# EAGLE board Battery_Block-Panel-v10 (EAGLE 6.6.0), part 1 of 3
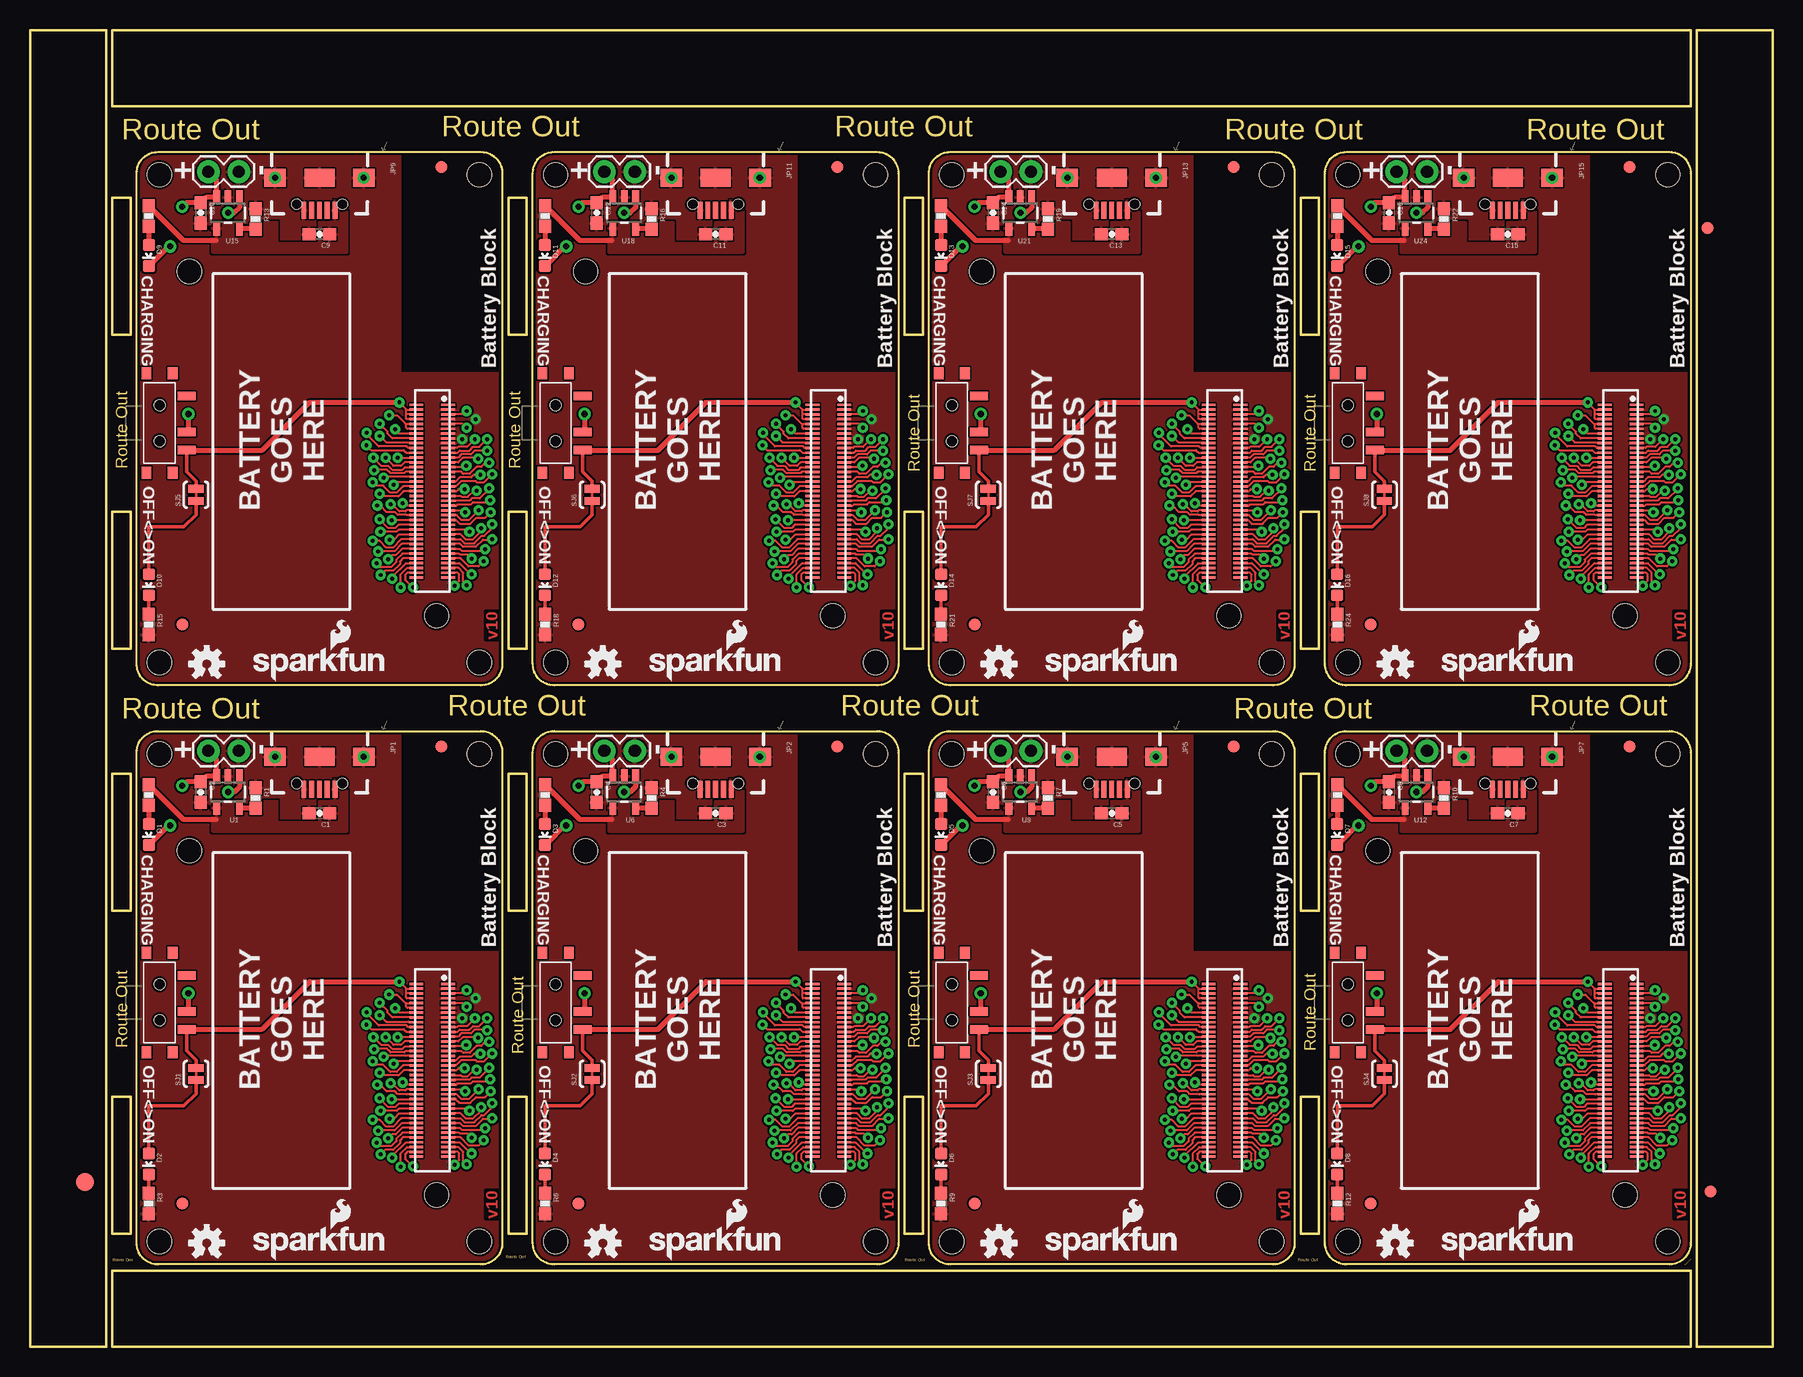
[diagram p0: board, top side]
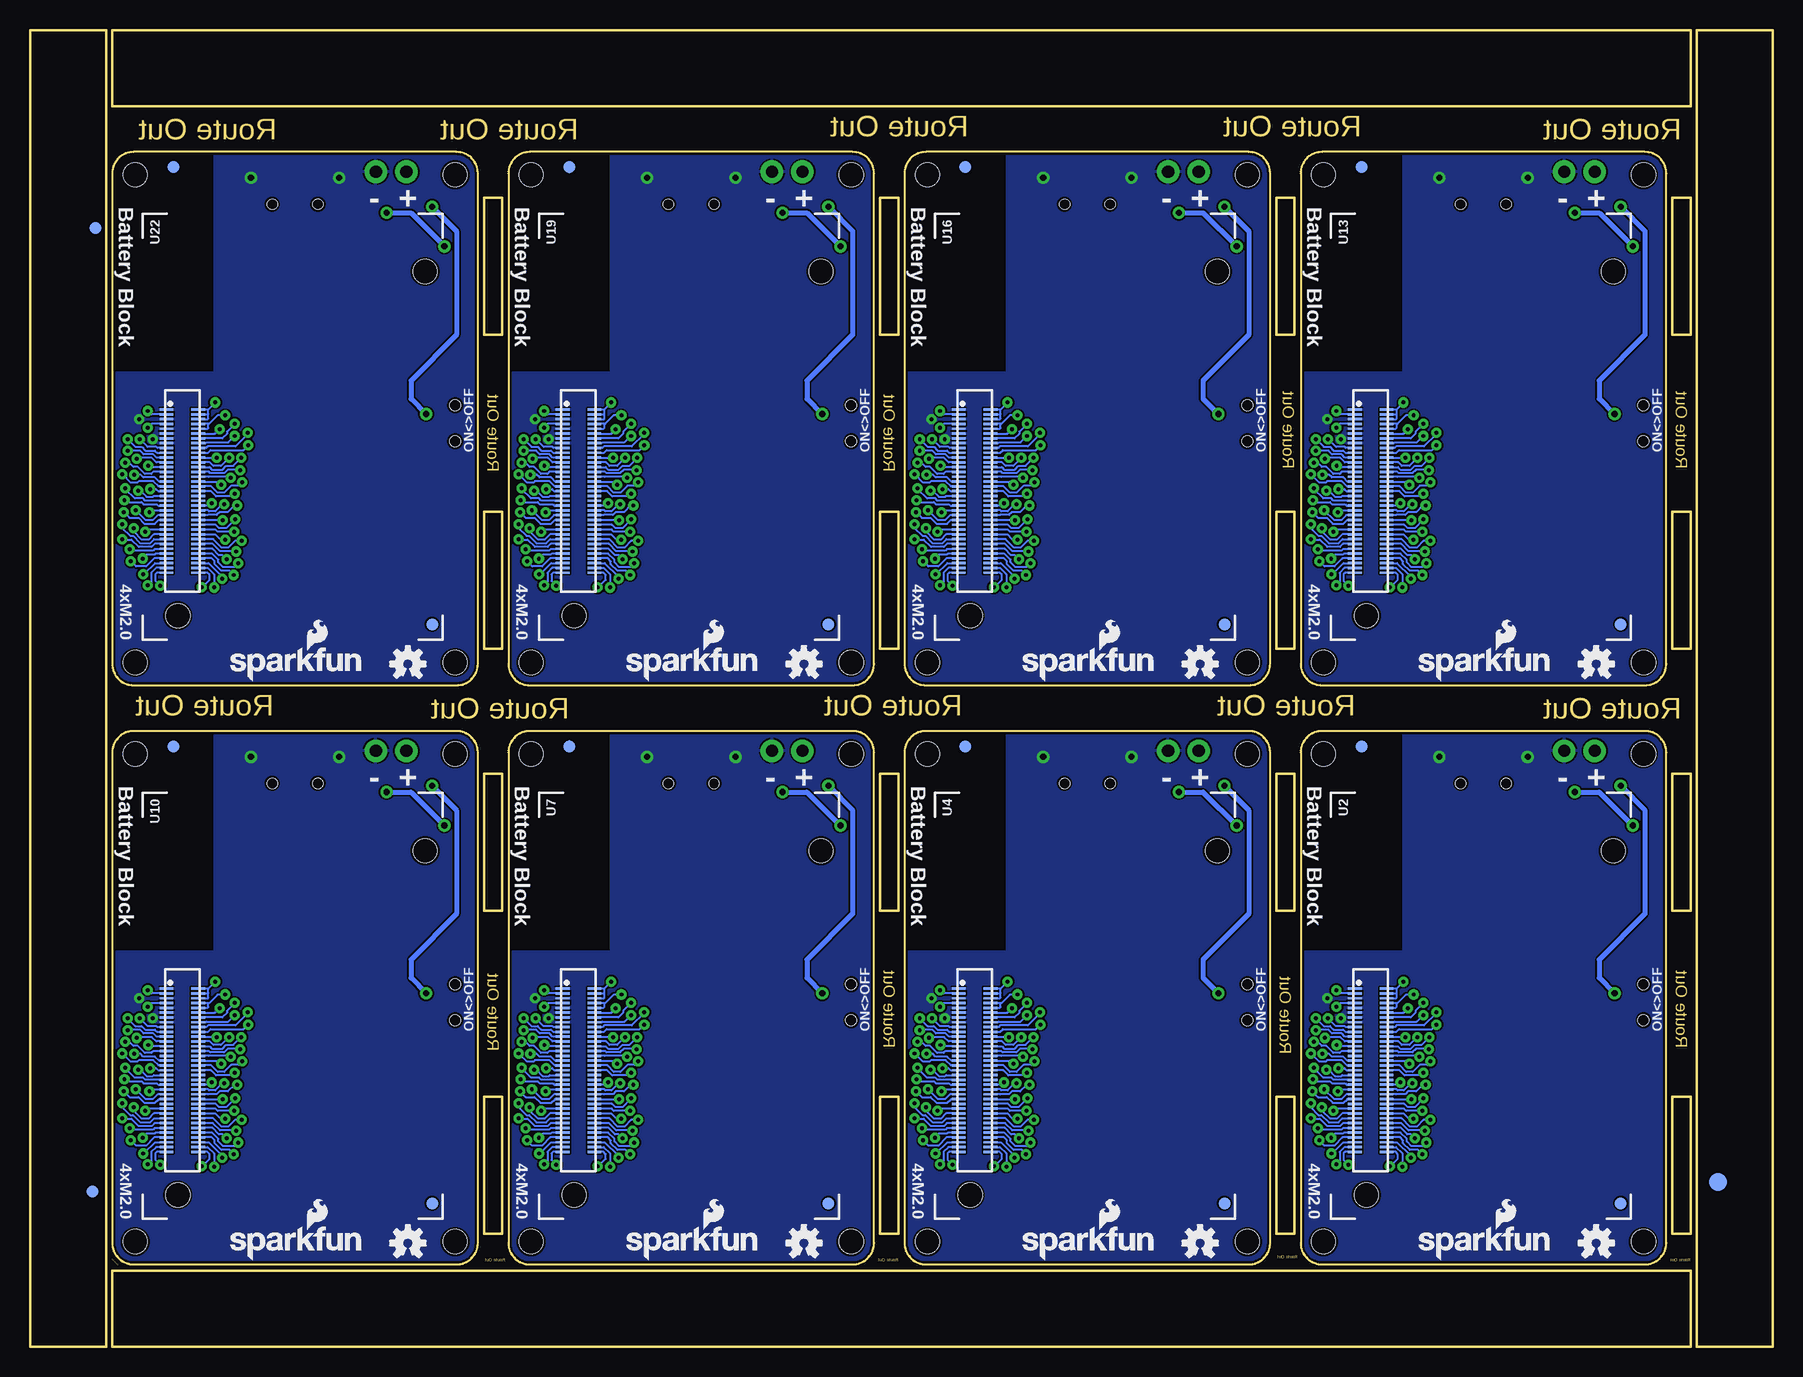
[diagram p1: board, bottom side, seen from below]

Size 145.29 x 109.73 mm. Coordinates in mm from the lower left corner, seen from the top.
Outline: 6.35,79.25 6.35,0 0,0 0,29.72
Outline: 0,27.18 0,109.73 6.35,109.73 6.35,76.71
Outline: 39.37,49.53 39.37,8.64 arc-90 37.59,6.86 10.67,6.86 arc-90 8.89,8.64 8.89,49.53 arc-90 10.67,51.31 37.59,51.31 arc-90 39.37,49.53
Outline: 72.39,49.53 72.39,8.64 arc-90 70.61,6.86 43.69,6.86 arc-90 41.91,8.64 41.91,49.53 arc-90 43.69,51.31 70.61,51.31 arc-90 72.39,49.53
Outline: 105.41,49.53 105.41,8.64 arc-90 103.63,6.86 76.71,6.86 arc-90 74.93,8.64 74.93,49.53 arc-90 76.71,51.31 103.63,51.31 arc-90 105.41,49.53
Outline: 138.43,49.53 138.43,8.64 arc-90 136.65,6.86 109.73,6.86 arc-90 107.95,8.64 107.95,49.53 arc-90 109.73,51.31 136.65,51.31 arc-90 138.43,49.53
Outline: 39.37,97.79 39.37,56.9 arc-90 37.59,55.12 10.67,55.12 arc-90 8.89,56.9 8.89,97.79 arc-90 10.67,99.57 37.59,99.57 arc-90 39.37,97.79
Outline: 72.39,97.79 72.39,56.9 arc-90 70.61,55.12 43.69,55.12 arc-90 41.91,56.9 41.91,97.79 arc-90 43.69,99.57 70.61,99.57 arc-90 72.39,97.79
Outline: 105.41,97.79 105.41,56.9 arc-90 103.63,55.12 76.71,55.12 arc-90 74.93,56.9 74.93,97.79 arc-90 76.71,99.57 103.63,99.57 arc-90 105.41,97.79
Outline: 138.43,97.79 138.43,56.9 arc-90 136.65,55.12 109.73,55.12 arc-90 107.95,56.9 107.95,97.79 arc-90 109.73,99.57 136.65,99.57 arc-90 138.43,97.79
Outline: 6.86,0 138.43,0 138.43,6.35 6.86,6.35 6.86,0
Outline: 145.29,0 145.29,109.73 138.94,109.73 138.94,0 145.29,0
Outline: 138.43,109.73 6.86,109.73 6.86,103.38 138.43,103.38 138.43,109.73
Outline: 8.38,9.4 8.38,20.83 6.86,20.83 6.86,9.4 8.38,9.4
Outline: 41.4,9.4 41.4,20.83 39.88,20.83 39.88,9.4 41.4,9.4
Outline: 74.42,9.4 74.42,20.83 72.9,20.83 72.9,9.4 74.42,9.4
Outline: 107.44,9.4 107.44,20.83 105.92,20.83 105.92,9.4 107.44,9.4
Outline: 105.92,47.75 105.92,36.32 107.44,36.32 107.44,47.75 105.92,47.75
Outline: 72.9,47.75 72.9,36.32 74.42,36.32 74.42,47.75 72.9,47.75
Outline: 39.88,47.75 39.88,36.32 41.4,36.32 41.4,47.75 39.88,47.75
Outline: 6.86,47.75 6.86,36.32 8.38,36.32 8.38,47.75 6.86,47.75
Outline: 8.38,58.17 8.38,69.6 6.86,69.6 6.86,58.17 8.38,58.17
Outline: 41.4,58.17 41.4,69.6 39.88,69.6 39.88,58.17 41.4,58.17
Outline: 74.42,58.17 74.42,69.6 72.9,69.6 72.9,58.17 74.42,58.17
Outline: 107.44,58.17 107.44,69.6 105.92,69.6 105.92,58.17 107.44,58.17
Outline: 105.92,95.76 105.92,84.33 107.44,84.33 107.44,95.76 105.92,95.76
Outline: 72.9,95.76 72.9,84.33 74.42,84.33 74.42,95.76 72.9,95.76
Outline: 39.88,95.76 39.88,84.33 41.4,84.33 41.4,95.76 39.88,95.76
Outline: 6.86,95.76 6.86,84.33 8.38,84.33 8.38,95.76 6.86,95.76
Copper layers (1*16): Top 0.035mm / dielectric 1.5mm / Bottom 0.035mm
Design rules "SparkFun-2-layer *": minimum track width 6mil, minimum drill 13mil, track to track 6mil, track to pad 6mil, pad to pad 6mil, via to via 6mil, smd to smd 6mil, copper to edge 8mil, drill to drill 8mil, minimum pad ring 12mil, minimum via ring 10mil, stop-mask expansion 4mil, vias tented up to drill 20mil, thermal gap 6mil
Holes 2 mm at 37.47,8.76 10.79,8.76 10.79,49.4 37.47,49.4 70.48,8.76 43.81,8.76 43.81,49.4 70.48,49.4 103.5,8.76 76.83,8.76 76.83,49.4 103.5,49.4 136.53,8.76 109.86,8.76 109.86,49.4 136.53,49.4 37.47,57.02 10.79,57.02 10.79,97.66 37.47,97.66 70.48,57.02 43.81,57.02 43.81,97.66 70.48,97.66 103.5,57.02 76.83,57.02 76.83,97.66 103.5,97.66 136.53,57.02 109.86,57.02 109.86,97.66 136.53,97.66
tRestrict: area 31,33 to 39.4,51.3; area 64,33 to 72.4,51.3; area 97,33 to 105.4,51.3; area 130,33 to 138.4,51.3; area 31,81.3 to 39.4,99.6; area 64,81.3 to 72.4,99.6; area 97,81.3 to 105.4,99.6; area 130,81.3 to 138.4,99.6
bRestrict: area 31,33 to 39.4,51.3; area 64,33 to 72.4,51.3; area 97,33 to 105.4,51.3; area 130,33 to 138.4,51.3; area 31,81.3 to 39.4,99.6; area 64,81.3 to 72.4,99.6; area 97,81.3 to 105.4,99.6; area 130,81.3 to 138.4,99.6

## Footprints (pad centres in the part's own frame; a part is rotated, then mirrored left to right if it is on the bottom)
0603-CAP = smd 1.1 x 1: 1 -0.85,0; 2 0.85,0
LED-0603 = smd 1 x 1: A 0,-0.877; C 0,0.877
FIDUCIAL-1.5X3 = smd 1.5 x 1.5: 1 0,0
FIDUCIAL-1X2 = smd 1 x 1: 1 0,0
USB-B-MICRO-SMD_V03 = smd 1.4 x 0.4: D+1 2.7,0; D-1 2.7,0.65; GND1 2.7,-1.3; ID1 2.7,-0.65; VBUS1 2.7,1.3 | smd 1.5 x 1.8: SHIELD1 0,3.7; SHIELD2 0,-3.7 | smd 1.5 x 2.5: SHIELD3 0,0 | hole 0.85: 2.2,1.9; 2.2,-1.9
1X02 = drill 1.016 pad 1.88: 1 0,0; 2 2.54,0
0603-RES = smd 1.1 x 1: 1 -0.85,0; 2 0.85,0
PAD-JUMPER-2-NC_BY_TRACE_YES_SILK = smd 0.635 x 1.27: 1 -0.508,0; 2 0.508,0
KPS-1290 = smd 0.7 x 1.5: O -2.25,2.25; P 0.75,2.25; S 2.25,2.25 | smd 1 x 0.8: P$1 -4.15,1.1; P$2 -4.15,-1.1; P$3 4.15,-1.1; P$4 4.15,1.1 | hole 0.9: -1.5,0; 1.5,0
SOT23-5 = smd 0.55 x 1.2: 1 -0.95,-1.3; 2 0,-1.3; 3 0.95,-1.3; 4 0.95,1.3; 5 -0.95,1.3
EDISON_DAUGHTER = smd 1.14 x 0.2: 1 1.98,19.17; 2 4.62,19.17; 3 1.98,18.77; 4 4.62,18.77; 5 1.98,18.37; 6 4.62,18.37; 7 1.98,17.97; 8 4.62,17.97; 9 1.98,17.57; 10 4.62,17.57; 11 1.98,17.17; 12 4.62,17.17; 13 1.98,16.77; 14 4.62,16.77; 15 1.98,16.37; 16 4.62,16.37; 17 1.98,15.97; 18 4.62,15.97; 19 1.98,15.57; 20 4.62,15.57; 21 1.98,15.17; 22 4.62,15.17; 23 1.98,14.77; 24 4.62,14.77; 25 1.98,14.37; 26 4.62,14.37; 27 1.98,13.97; 28 4.62,13.97; 29 1.98,13.57; 30 4.62,13.57; 31 1.98,13.17; 32 4.62,13.17; 33 1.98,12.77; 34 4.62,12.77; 35 1.98,12.37; 36 4.62,12.37; 37 1.98,11.97; 38 4.62,11.97; 39 1.98,11.57; 40 4.62,11.57; 41 1.98,11.17; 42 4.62,11.17; 43 1.98,10.77; 44 4.62,10.77; 45 1.98,10.37; 46 4.62,10.37; 47 1.98,9.97; 48 4.62,9.97; 49 1.98,9.57; 50 4.62,9.57; 51 1.98,9.17; 52 4.62,9.17; 53 1.98,8.77; 54 4.62,8.77; 55 1.98,8.37; 56 4.62,8.37; 57 1.98,7.97; 58 4.62,7.97; 59 1.98,7.57; 60 4.62,7.57; 61 1.98,7.17; 62 4.62,7.17; 63 1.98,6.77; 64 4.62,6.77; 65 1.98,6.37; 66 4.62,6.37; 67 1.98,5.97; 68 4.62,5.97; 69 1.98,5.57; 70 4.62,5.57 | hole 2: 23.53,30.67; 2.93,1.98
DF40C-70DP-0.4(51) = smd 0.2 x 1.14 bottom: 1 6.8,1.32; 2 6.8,-1.32; 3 6.4,1.32; 4 6.4,-1.32; 5 6,1.32; 6 6,-1.32; 7 5.6,1.32; 8 5.6,-1.32; 9 5.2,1.32; 10 5.2,-1.32; 11 4.8,1.32; 12 4.8,-1.32; 13 4.4,1.32; 14 4.4,-1.32; 15 4,1.32; 16 4,-1.32; 17 3.6,1.32; 18 3.6,-1.32; 19 3.2,1.32; 20 3.2,-1.32; 21 2.8,1.32; 22 2.8,-1.32; 23 2.4,1.32; 24 2.4,-1.32; 25 2,1.32; 26 2,-1.32; 27 1.6,1.32; 28 1.6,-1.32; 29 1.2,1.32; 30 1.2,-1.32; 31 0.8,1.32; 32 0.8,-1.32; 33 0.4,1.32; 34 0.4,-1.32; 35 0,1.32; 36 0,-1.32; 37 -0.4,1.32; 38 -0.4,-1.32; 39 -0.8,1.32; 40 -0.8,-1.32; 41 -1.2,1.32; 42 -1.2,-1.32; 43 -1.6,1.32; 44 -1.6,-1.32; 45 -2,1.32; 46 -2,-1.32; 47 -2.4,1.32; 48 -2.4,-1.32; 49 -2.8,1.32; 50 -2.8,-1.32; 51 -3.2,1.32; 52 -3.2,-1.32; 53 -3.6,1.32; 54 -3.6,-1.32; 55 -4,1.32; 56 -4,-1.32; 57 -4.4,1.32; 58 -4.4,-1.32; 59 -4.8,1.32; 60 -4.8,-1.32; 61 -5.2,1.32; 62 -5.2,-1.32; 63 -5.6,1.32; 64 -5.6,-1.32; 65 -6,1.32; 66 -6,-1.32; 67 -6.4,1.32; 68 -6.4,-1.32; 69 -6.8,1.32; 70 -6.8,-1.32; NC1 7.2,1.32; NC2 7.2,-1.32; NC3 -7.2,-1.32; NC4 -7.2,1.32

## Placement (x,y rotation side)
C1  4.7uF  [0603-CAP]  24.13,44.45 180 top
C2  4.7uF  [0603-CAP]  14.22,46.23 270 top
C3  4.7uF  [0603-CAP]  57.15,44.45 180 top
C4  4.7uF  [0603-CAP]  47.24,46.23 270 top
C5  4.7uF  [0603-CAP]  90.17,44.45 180 top
C6  4.7uF  [0603-CAP]  80.26,46.23 270 top
C7  4.7uF  [0603-CAP]  123.19,44.45 180 top
C8  4.7uF  [0603-CAP]  113.28,46.23 270 top
C9  4.7uF  [0603-CAP]  24.13,92.71 180 top
C10  4.7uF  [0603-CAP]  14.22,94.49 270 top
C11  4.7uF  [0603-CAP]  57.15,92.71 180 top
C12  4.7uF  [0603-CAP]  47.24,94.49 270 top
C13  4.7uF  [0603-CAP]  90.17,92.71 180 top
C14  4.7uF  [0603-CAP]  80.26,94.49 270 top
C15  4.7uF  [0603-CAP]  123.19,92.71 180 top
C16  4.7uF  [0603-CAP]  113.28,94.49 270 top
D1  RED  [LED-0603]  9.91,42.67 180 top
D2  BLUE  [LED-0603]  9.91,15.24 180 top
D3  RED  [LED-0603]  42.93,42.67 180 top
D4  BLUE  [LED-0603]  42.93,15.24 180 top
D5  RED  [LED-0603]  75.95,42.67 180 top
D6  BLUE  [LED-0603]  75.95,15.24 180 top
D7  RED  [LED-0603]  108.97,42.67 180 top
D8  BLUE  [LED-0603]  108.97,15.24 180 top
D9  RED  [LED-0603]  9.91,90.93 180 top
D10  BLUE  [LED-0603]  9.91,63.5 180 top
D11  RED  [LED-0603]  42.93,90.93 180 top
D12  BLUE  [LED-0603]  42.93,63.5 180 top
D13  RED  [LED-0603]  75.95,90.93 180 top
D14  BLUE  [LED-0603]  75.95,63.5 180 top
D15  RED  [LED-0603]  108.97,90.93 180 top
D16  BLUE  [LED-0603]  108.97,63.5 180 top
E$1  [FIDUCIAL-1.5X3]  4.57,13.72 0 top
E$2  [FIDUCIAL-1.5X3]  4.57,13.72 0 bottom
E$3  [FIDUCIAL-1X2]  140.08,12.95 0 bottom
E$4  [FIDUCIAL-1X2]  140.08,12.95 0 top
E$5  [FIDUCIAL-1X2]  139.83,93.22 180 top
E$6  [FIDUCIAL-1X2]  139.83,93.22 180 bottom
FID1  FIDUCIAL1X2  [FIDUCIAL-1X2]  12.7,11.94 0 top
FID2  FIDUCIAL1X2  [FIDUCIAL-1X2]  34.29,50.04 0 top
FID3  FIDUCIAL1X2  [FIDUCIAL-1X2]  12.7,11.94 0 bottom
FID4  FIDUCIAL1X2  [FIDUCIAL-1X2]  34.29,50.04 0 bottom
FID5  FIDUCIAL1X2  [FIDUCIAL-1X2]  45.72,11.94 0 top
FID6  FIDUCIAL1X2  [FIDUCIAL-1X2]  67.31,50.04 0 top
FID7  FIDUCIAL1X2  [FIDUCIAL-1X2]  45.72,11.94 0 bottom
FID8  FIDUCIAL1X2  [FIDUCIAL-1X2]  67.31,50.04 0 bottom
FID9  FIDUCIAL1X2  [FIDUCIAL-1X2]  78.74,11.94 0 top
FID10  FIDUCIAL1X2  [FIDUCIAL-1X2]  100.33,50.04 0 top
FID11  FIDUCIAL1X2  [FIDUCIAL-1X2]  78.74,11.94 0 bottom
FID12  FIDUCIAL1X2  [FIDUCIAL-1X2]  100.33,50.04 0 bottom
FID13  FIDUCIAL1X2  [FIDUCIAL-1X2]  111.76,11.94 0 top
FID14  FIDUCIAL1X2  [FIDUCIAL-1X2]  133.35,50.04 0 top
FID15  FIDUCIAL1X2  [FIDUCIAL-1X2]  111.76,11.94 0 bottom
FID16  FIDUCIAL1X2  [FIDUCIAL-1X2]  133.35,50.04 0 bottom
FID17  FIDUCIAL1X2  [FIDUCIAL-1X2]  12.7,60.2 0 top
FID18  FIDUCIAL1X2  [FIDUCIAL-1X2]  34.29,98.3 0 top
FID19  FIDUCIAL1X2  [FIDUCIAL-1X2]  12.7,60.2 0 bottom
FID20  FIDUCIAL1X2  [FIDUCIAL-1X2]  34.29,98.3 0 bottom
FID21  FIDUCIAL1X2  [FIDUCIAL-1X2]  45.72,60.2 0 top
FID22  FIDUCIAL1X2  [FIDUCIAL-1X2]  67.31,98.3 0 top
FID23  FIDUCIAL1X2  [FIDUCIAL-1X2]  45.72,60.2 0 bottom
FID24  FIDUCIAL1X2  [FIDUCIAL-1X2]  67.31,98.3 0 bottom
FID25  FIDUCIAL1X2  [FIDUCIAL-1X2]  78.74,60.2 0 top
FID26  FIDUCIAL1X2  [FIDUCIAL-1X2]  100.33,98.3 0 top
FID27  FIDUCIAL1X2  [FIDUCIAL-1X2]  78.74,60.2 0 bottom
FID28  FIDUCIAL1X2  [FIDUCIAL-1X2]  100.33,98.3 0 bottom
FID29  FIDUCIAL1X2  [FIDUCIAL-1X2]  111.76,60.2 0 top
FID30  FIDUCIAL1X2  [FIDUCIAL-1X2]  133.35,98.3 0 top
FID31  FIDUCIAL1X2  [FIDUCIAL-1X2]  111.76,60.2 0 bottom
FID32  FIDUCIAL1X2  [FIDUCIAL-1X2]  133.35,98.3 0 bottom
JP1  USB_MICROB_PLUG  [USB-B-MICRO-SMD_V03]  24.13,49.15 270 top
JP2  USB_MICROB_PLUG  [USB-B-MICRO-SMD_V03]  57.15,49.15 270 top
JP3  M02PTH  [1X02]  14.86,49.66 0 top
JP4  M02PTH  [1X02]  47.88,49.66 0 top
JP5  USB_MICROB_PLUG  [USB-B-MICRO-SMD_V03]  90.17,49.15 270 top
JP6  M02PTH  [1X02]  80.9,49.66 0 top
JP7  USB_MICROB_PLUG  [USB-B-MICRO-SMD_V03]  123.19,49.15 270 top
JP8  M02PTH  [1X02]  113.92,49.66 0 top
JP9  USB_MICROB_PLUG  [USB-B-MICRO-SMD_V03]  24.13,97.41 270 top
JP10  M02PTH  [1X02]  14.86,97.92 0 top
JP11  USB_MICROB_PLUG  [USB-B-MICRO-SMD_V03]  57.15,97.41 270 top
JP12  M02PTH  [1X02]  47.88,97.92 0 top
JP13  USB_MICROB_PLUG  [USB-B-MICRO-SMD_V03]  90.17,97.41 270 top
JP14  M02PTH  [1X02]  80.9,97.92 0 top
JP15  USB_MICROB_PLUG  [USB-B-MICRO-SMD_V03]  123.19,97.41 270 top
JP16  M02PTH  [1X02]  113.92,97.92 0 top
LOGO1  OSHW-LOGOS  [OSHW-LOGO-S]  14.73,8.64 0 top
LOGO2  OSHW-LOGOS  [OSHW-LOGO-S]  14.73,8.64 0 bottom
LOGO3  SFE_LOGO_NAME_FLAME.1_INCH  [SFE_LOGO_NAME_FLAME_.1]  29.97,7.11 0 bottom
LOGO4  SFE_LOGO_NAME_FLAME.1_INCH  [SFE_LOGO_NAME_FLAME_.1]  18.19,7.11 0 top
LOGO5  OSHW-LOGOS  [OSHW-LOGO-S]  47.75,8.64 0 bottom
LOGO6  SFE_LOGO_NAME_FLAME.1_INCH  [SFE_LOGO_NAME_FLAME_.1]  62.99,7.11 0 bottom
LOGO7  OSHW-LOGOS  [OSHW-LOGO-S]  47.75,8.64 0 top
LOGO8  SFE_LOGO_NAME_FLAME.1_INCH  [SFE_LOGO_NAME_FLAME_.1]  51.21,7.11 0 top
LOGO9  OSHW-LOGOS  [OSHW-LOGO-S]  80.77,8.64 0 bottom
LOGO10  SFE_LOGO_NAME_FLAME.1_INCH  [SFE_LOGO_NAME_FLAME_.1]  96.01,7.11 0 bottom
LOGO11  OSHW-LOGOS  [OSHW-LOGO-S]  80.77,8.64 0 top
LOGO12  SFE_LOGO_NAME_FLAME.1_INCH  [SFE_LOGO_NAME_FLAME_.1]  84.23,7.11 0 top
LOGO13  OSHW-LOGOS  [OSHW-LOGO-S]  113.79,8.64 0 bottom
LOGO14  SFE_LOGO_NAME_FLAME.1_INCH  [SFE_LOGO_NAME_FLAME_.1]  129.03,7.11 0 bottom
LOGO15  OSHW-LOGOS  [OSHW-LOGO-S]  113.79,8.64 0 top
LOGO16  SFE_LOGO_NAME_FLAME.1_INCH  [SFE_LOGO_NAME_FLAME_.1]  117.25,7.11 0 top
LOGO17  OSHW-LOGOS  [OSHW-LOGO-S]  14.73,56.9 0 bottom
LOGO18  SFE_LOGO_NAME_FLAME.1_INCH  [SFE_LOGO_NAME_FLAME_.1]  29.97,55.37 0 bottom
LOGO19  OSHW-LOGOS  [OSHW-LOGO-S]  14.73,56.9 0 top
LOGO20  SFE_LOGO_NAME_FLAME.1_INCH  [SFE_LOGO_NAME_FLAME_.1]  18.19,55.37 0 top
LOGO21  OSHW-LOGOS  [OSHW-LOGO-S]  47.75,56.9 0 bottom
LOGO22  SFE_LOGO_NAME_FLAME.1_INCH  [SFE_LOGO_NAME_FLAME_.1]  62.99,55.37 0 bottom
LOGO23  OSHW-LOGOS  [OSHW-LOGO-S]  47.75,56.9 0 top
LOGO24  SFE_LOGO_NAME_FLAME.1_INCH  [SFE_LOGO_NAME_FLAME_.1]  51.21,55.37 0 top
LOGO25  OSHW-LOGOS  [OSHW-LOGO-S]  80.77,56.9 0 bottom
LOGO26  SFE_LOGO_NAME_FLAME.1_INCH  [SFE_LOGO_NAME_FLAME_.1]  96.01,55.37 0 bottom
LOGO27  OSHW-LOGOS  [OSHW-LOGO-S]  80.77,56.9 0 top
LOGO28  SFE_LOGO_NAME_FLAME.1_INCH  [SFE_LOGO_NAME_FLAME_.1]  84.23,55.37 0 top
LOGO29  OSHW-LOGOS  [OSHW-LOGO-S]  113.79,56.9 0 bottom
LOGO30  SFE_LOGO_NAME_FLAME.1_INCH  [SFE_LOGO_NAME_FLAME_.1]  129.03,55.37 0 bottom
LOGO31  OSHW-LOGOS  [OSHW-LOGO-S]  113.79,56.9 0 top
LOGO32  SFE_LOGO_NAME_FLAME.1_INCH  [SFE_LOGO_NAME_FLAME_.1]  117.25,55.37 0 top
R1  2.0k  [0603-RES]  18.8,45.72 270 top
R2  330  [0603-RES]  9.91,45.97 90 top
R3  1k  [0603-RES]  9.91,11.94 270 top
R4  2.0k  [0603-RES]  51.82,45.72 270 top
R5  330  [0603-RES]  42.93,45.97 90 top
R6  1k  [0603-RES]  42.93,11.94 270 top
R7  2.0k  [0603-RES]  84.84,45.72 270 top
R8  330  [0603-RES]  75.95,45.97 90 top
R9  1k  [0603-RES]  75.95,11.94 270 top
R10  2.0k  [0603-RES]  117.86,45.72 270 top
R11  330  [0603-RES]  108.97,45.97 90 top
R12  1k  [0603-RES]  108.97,11.94 270 top
R13  2.0k  [0603-RES]  18.8,93.98 270 top
R14  330  [0603-RES]  9.91,94.23 90 top
R15  1k  [0603-RES]  9.91,60.2 270 top
R16  2.0k  [0603-RES]  51.82,93.98 270 top
R17  330  [0603-RES]  42.93,94.23 90 top
R18  1k  [0603-RES]  42.93,60.2 270 top
R19  2.0k  [0603-RES]  84.84,93.98 270 top
R20  330  [0603-RES]  75.95,94.23 90 top
R21  1k  [0603-RES]  75.95,60.2 270 top
R22  2.0k  [0603-RES]  117.86,93.98 270 top
R23  330  [0603-RES]  108.97,94.23 90 top
R24  1k  [0603-RES]  108.97,60.2 270 top
SJ1  LED DISABLE  [PAD-JUMPER-2-NC_BY_TRACE_YES_SILK]  13.84,22.73 90 top
SJ2  LED DISABLE  [PAD-JUMPER-2-NC_BY_TRACE_YES_SILK]  46.86,22.73 90 top
SJ3  LED DISABLE  [PAD-JUMPER-2-NC_BY_TRACE_YES_SILK]  79.88,22.73 90 top
SJ4  LED DISABLE  [PAD-JUMPER-2-NC_BY_TRACE_YES_SILK]  112.9,22.73 90 top
SJ5  LED DISABLE  [PAD-JUMPER-2-NC_BY_TRACE_YES_SILK]  13.84,70.99 90 top
SJ6  LED DISABLE  [PAD-JUMPER-2-NC_BY_TRACE_YES_SILK]  46.86,70.99 90 top
SJ7  LED DISABLE  [PAD-JUMPER-2-NC_BY_TRACE_YES_SILK]  79.88,70.99 90 top
SJ8  LED DISABLE  [PAD-JUMPER-2-NC_BY_TRACE_YES_SILK]  112.9,70.99 90 top
SW1  SWITCH_SPDT  [KPS-1290]  10.79,28.7 270 top
SW2  SWITCH_SPDT  [KPS-1290]  43.81,28.7 270 top
SW3  SWITCH_SPDT  [KPS-1290]  76.83,28.7 270 top
SW4  SWITCH_SPDT  [KPS-1290]  109.86,28.7 270 top
SW5  SWITCH_SPDT  [KPS-1290]  10.79,76.96 270 top
SW6  SWITCH_SPDT  [KPS-1290]  43.81,76.96 270 top
SW7  SWITCH_SPDT  [KPS-1290]  76.83,76.96 270 top
SW8  SWITCH_SPDT  [KPS-1290]  109.86,76.96 270 top
U1  MCP73831  [SOT23-5]  16.51,46.23 180 top
U2  EDISON_CONNECTOR_FULLMOUNTING_HOLES  [EDISON_DAUGHTER]  36.83,10.67 0 bottom
U3  EDISON_CONNECTOR_FULLHEADER  [DF40C-70DP-0.4(51)]  33.53,23.04 90 bottom
U4  EDISON_CONNECTOR_FULLMOUNTING_HOLES  [EDISON_DAUGHTER]  69.85,10.67 0 bottom
U5  EDISON_CONNECTOR_FULLHEADER  [DF40C-70DP-0.4(51)]  66.55,23.04 90 bottom
U6  MCP73831  [SOT23-5]  49.53,46.23 180 top
U7  EDISON_CONNECTOR_FULLMOUNTING_HOLES  [EDISON_DAUGHTER]  102.87,10.67 0 bottom
U8  EDISON_CONNECTOR_FULLHEADER  [DF40C-70DP-0.4(51)]  99.57,23.04 90 bottom
U9  MCP73831  [SOT23-5]  82.55,46.23 180 top
U10  EDISON_CONNECTOR_FULLMOUNTING_HOLES  [EDISON_DAUGHTER]  135.89,10.67 0 bottom
U11  EDISON_CONNECTOR_FULLHEADER  [DF40C-70DP-0.4(51)]  132.59,23.04 90 bottom
U12  MCP73831  [SOT23-5]  115.57,46.23 180 top
U13  EDISON_CONNECTOR_FULLMOUNTING_HOLES  [EDISON_DAUGHTER]  36.83,58.93 0 bottom
U14  EDISON_CONNECTOR_FULLHEADER  [DF40C-70DP-0.4(51)]  33.53,71.3 90 bottom
U15  MCP73831  [SOT23-5]  16.51,94.49 180 top
U16  EDISON_CONNECTOR_FULLMOUNTING_HOLES  [EDISON_DAUGHTER]  69.85,58.93 0 bottom
U17  EDISON_CONNECTOR_FULLHEADER  [DF40C-70DP-0.4(51)]  66.55,71.3 90 bottom
U18  MCP73831  [SOT23-5]  49.53,94.49 180 top
U19  EDISON_CONNECTOR_FULLMOUNTING_HOLES  [EDISON_DAUGHTER]  102.87,58.93 0 bottom
U20  EDISON_CONNECTOR_FULLHEADER  [DF40C-70DP-0.4(51)]  99.57,71.3 90 bottom
U21  MCP73831  [SOT23-5]  82.55,94.49 180 top
U22  EDISON_CONNECTOR_FULLMOUNTING_HOLES  [EDISON_DAUGHTER]  135.89,58.93 0 bottom
U23  EDISON_CONNECTOR_FULLHEADER  [DF40C-70DP-0.4(51)]  132.59,71.3 90 bottom
U24  MCP73831  [SOT23-5]  115.57,94.49 180 top

## Library data of the parts
C1-C16 = SparkFun-Capacitors; PROD_ID: CAP-08280
D1 D3 D5 D7 D9 D11 D13 D15 = SparkFun-LED; PROD_ID: DIO-00819
D2 D4 D6 D8 D10 D12 D14 D16 = SparkFun-LED; PROD_ID: DIO-08575
E$1 E$2 = SparkFun-Retired
E$3-E$6 FID1-FID32 LOGO1-LOGO32 = SparkFun-Aesthetics
JP1 JP2 JP5 JP7 JP9 JP11 JP13 JP15 = SparkFun-Connectors; PROD_ID: CONN-11752
JP3 JP4 JP6 JP8 JP10 JP12 JP14 JP16 = SparkFun-Connectors
R1 R4 R7 R10 R13 R16 R19 R22 = SparkFun-Resistors; PROD_ID: RES-08296
R2 R5 R8 R11 R14 R17 R20 R23 = SparkFun-Resistors; PROD_ID: RES-00818
R3 R6 R9 R12 R15 R18 R21 R24 = SparkFun-Resistors; PROD_ID: RES-07856
SJ1-SJ8 = SparkFun-Passives
SW1-SW8 = SparkFun-Electromechanical; PROD_ID: SWCH-10651
U1 U6 U9 U12 U15 U18 U21 U24 = SparkFun-PowerIC; PROD_ID: IC-09995
U2-U5 U7 U8 U10 U11 U13 U14 U16 U17 U19 U20 U22 U23 = Edison

## Nets
1.8V: U2.12 U3.12
1.8V1: U4.12 U5.12
1.8V2: U7.12 U8.12
1.8V3: U10.12 U11.12
1.8V4: U13.12 U14.12
1.8V5: U16.12 U17.12
1.8V6: U19.12 U20.12
1.8V7: U22.12 U23.12
3.3V: U2.8 U2.10 U3.8 U3.10
3.3V1: U4.8 U4.10 U5.8 U5.10
3.3V2: U7.8 U7.10 U8.8 U8.10
3.3V3: U10.8 U10.10 U11.8 U11.10
3.3V4: U13.8 U13.10 U14.8 U14.10
3.3V5: U16.8 U16.10 U17.8 U17.10
3.3V6: U19.8 U19.10 U20.8 U20.10
3.3V7: U22.8 U22.10 U23.8 U23.10
DCIN: U2.14 U3.14
DCIN1: U4.14 U5.14
DCIN2: U7.14 U8.14
DCIN3: U10.14 U11.14
DCIN4: U13.14 U14.14
DCIN5: U16.14 U17.14
DCIN6: U19.14 U20.14
DCIN7: U22.14 U23.14
FAULT: U2.19 U3.19
FAULT1: U4.19 U5.19
FAULT2: U7.19 U8.19
FAULT3: U10.19 U11.19
FAULT4: U13.19 U14.19
FAULT5: U16.19 U17.19
FAULT6: U19.19 U20.19
FAULT7: U22.19 U23.19
FW_RCVR: U2.69 U3.69
FW_RCVR1: U4.69 U5.69
FW_RCVR2: U7.69 U8.69
FW_RCVR3: U10.69 U11.69
FW_RCVR4: U13.69 U14.69
FW_RCVR5: U16.69 U17.69
FW_RCVR6: U19.69 U20.69
FW_RCVR7: U22.69 U23.69
GND: C1.2 C2.2 JP1.GND1 JP1.SHIELD1 JP1.SHIELD2 JP1.SHIELD3 JP3.2 R1.1 R3.2 U1.2 U2.1 U2.5 U2.9 U2.11 U2.13 U2.15 U3.1 U3.5 U3.9 U3.11 U3.13 U3.15
GND1: C3.2 C4.2 JP2.GND1 JP2.SHIELD1 JP2.SHIELD2 JP2.SHIELD3 JP4.2 R4.1 R6.2 U4.1 U4.5 U4.9 U4.11 U4.13 U4.15 U5.1 U5.5 U5.9 U5.11 U5.13 U5.15 U6.2
GND2: C5.2 C6.2 JP5.GND1 JP5.SHIELD1 JP5.SHIELD2 JP5.SHIELD3 JP6.2 R7.1 R9.2 U7.1 U7.5 U7.9 U7.11 U7.13 U7.15 U8.1 U8.5 U8.9 U8.11 U8.13 U8.15 U9.2
GND3: C7.2 C8.2 JP7.GND1 JP7.SHIELD1 JP7.SHIELD2 JP7.SHIELD3 JP8.2 R10.1 R12.2 U10.1 U10.5 U10.9 U10.11 U10.13 U10.15 U11.1 U11.5 U11.9 U11.11 U11.13 U11.15 U12.2
GND4: C9.2 C10.2 JP9.GND1 JP9.SHIELD1 JP9.SHIELD2 JP9.SHIELD3 JP10.2 R13.1 R15.2 U13.1 U13.5 U13.9 U13.11 U13.13 U13.15 U14.1 U14.5 U14.9 U14.11 U14.13 U14.15 U15.2
GND5: C11.2 C12.2 JP11.GND1 JP11.SHIELD1 JP11.SHIELD2 JP11.SHIELD3 JP12.2 R16.1 R18.2 U16.1 U16.5 U16.9 U16.11 U16.13 U16.15 U17.1 U17.5 U17.9 U17.11 U17.13 U17.15 U18.2
GND6: C13.2 C14.2 JP13.GND1 JP13.SHIELD1 JP13.SHIELD2 JP13.SHIELD3 JP14.2 R19.1 R21.2 U19.1 U19.5 U19.9 U19.11 U19.13 U19.15 U20.1 U20.5 U20.9 U20.11 U20.13 U20.15 U21.2
GND7: C15.2 C16.2 JP15.GND1 JP15.SHIELD1 JP15.SHIELD2 JP15.SHIELD3 JP16.2 R22.1 R24.2 U22.1 U22.5 U22.9 U22.11 U22.13 U22.15 U23.1 U23.5 U23.9 U23.11 U23.13 U23.15 U24.2
GP1: U4.48 U5.48
GP2: U4.42 U5.42
GP3: U4.34 U5.34
GP4: U4.32 U5.32
GP5: U4.30 U5.30
GP6: U4.28 U5.28
GP7: U4.26 U5.26
GP8: U4.25 U5.25
GP9: U4.24 U5.24
GP10: U7.48 U8.48
GP11: U7.42 U8.42
GP12: U7.34 U8.34
GP12_PWM0: U2.35 U3.35
GP12_PWM1: U4.35 U5.35
GP12_PWM2: U7.35 U8.35
GP12_PWM3: U10.35 U11.35
GP12_PWM4: U13.35 U14.35
GP12_PWM5: U16.35 U17.35
GP12_PWM6: U19.35 U20.35
GP12_PWM7: U22.35 U23.35
GP13: U7.32 U8.32
GP13_PWM1: U2.33 U3.33
GP13_PWM2: U4.33 U5.33
GP13_PWM3: U7.33 U8.33
GP13_PWM4: U10.33 U11.33
GP13_PWM5: U13.33 U14.33
GP13_PWM6: U16.33 U17.33
GP13_PWM7: U19.33 U20.33
GP13_PWM8: U22.33 U23.33
GP14: U2.48 U3.48
GP15: U2.42 U3.42
GP16: U7.30 U8.30
GP17: U7.28 U8.28
GP18: U7.26 U8.26
GP19: U7.25 U8.25
GP19_I2C_1_SCL: U2.41 U3.41
GP19_I2C_1_SCL1: U4.41 U5.41
GP19_I2C_1_SCL2: U7.41 U8.41
GP19_I2C_1_SCL3: U10.41 U11.41
GP19_I2C_1_SCL4: U13.41 U14.41
GP19_I2C_1_SCL5: U16.41 U17.41
GP19_I2C_1_SCL6: U19.41 U20.41
GP19_I2C_1_SCL7: U22.41 U23.41
GP20: U7.24 U8.24
GP20_I2C_1_SDA: U2.43 U3.43
GP20_I2C_1_SDA1: U4.43 U5.43
GP20_I2C_1_SDA2: U7.43 U8.43
GP20_I2C_1_SDA3: U10.43 U11.43
GP20_I2C_1_SDA4: U13.43 U14.43
GP20_I2C_1_SDA5: U16.43 U17.43
GP20_I2C_1_SDA6: U19.43 U20.43
GP20_I2C_1_SDA7: U22.43 U23.43
GP21: U10.48 U11.48
GP22: U10.42 U11.42
GP23: U10.34 U11.34
GP24: U10.32 U11.32
GP25: U10.30 U11.30
GP26: U10.28 U11.28
GP27: U10.26 U11.26
GP27_I2C_6_SCL: U2.45 U3.45
GP27_I2C_6_SCL1: U4.45 U5.45
GP27_I2C_6_SCL2: U7.45 U8.45
GP27_I2C_6_SCL3: U10.45 U11.45
GP27_I2C_6_SCL4: U13.45 U14.45
GP27_I2C_6_SCL5: U16.45 U17.45
GP27_I2C_6_SCL6: U19.45 U20.45
GP27_I2C_6_SCL7: U22.45 U23.45
GP28: U10.25 U11.25
GP28_I2C_6_SDA: U2.47 U3.47
GP28_I2C_6_SDA1: U4.47 U5.47
GP28_I2C_6_SDA2: U7.47 U8.47
GP28_I2C_6_SDA3: U10.47 U11.47
GP28_I2C_6_SDA4: U13.47 U14.47
GP28_I2C_6_SDA5: U16.47 U17.47
GP28_I2C_6_SDA6: U19.47 U20.47
GP28_I2C_6_SDA7: U22.47 U23.47
GP29: U10.24 U11.24
GP30: U13.48 U14.48
GP31: U13.42 U14.42
GP32: U13.34 U14.34
GP33: U13.32 U14.32
GP34: U13.30 U14.30
GP35: U13.28 U14.28
GP36: U13.26 U14.26
GP37: U13.25 U14.25
GP38: U13.24 U14.24
GP39: U16.48 U17.48
GP40: U16.42 U17.42
GP40_I2S_2_CLK: U2.52 U3.52
GP40_I2S_2_CLK1: U4.52 U5.52
GP40_I2S_2_CLK2: U7.52 U8.52
GP40_I2S_2_CLK3: U10.52 U11.52
GP40_I2S_2_CLK4: U13.52 U14.52
GP40_I2S_2_CLK5: U16.52 U17.52
GP40_I2S_2_CLK6: U19.52 U20.52
GP40_I2S_2_CLK7: U22.52 U23.52
GP41: U16.34 U17.34
GP41_I2S_2_FS: U2.54 U3.54
GP41_I2S_2_FS1: U4.54 U5.54
GP41_I2S_2_FS2: U7.54 U8.54
GP41_I2S_2_FS3: U10.54 U11.54
GP41_I2S_2_FS4: U13.54 U14.54
GP41_I2S_2_FS5: U16.54 U17.54
GP41_I2S_2_FS6: U19.54 U20.54
GP41_I2S_2_FS7: U22.54 U23.54
GP42: U16.32 U17.32
GP42_I2S_2_RXD: U2.50 U3.50
GP42_I2S_2_RXD1: U4.50 U5.50
GP42_I2S_2_RXD2: U7.50 U8.50
GP42_I2S_2_RXD3: U10.50 U11.50
GP42_I2S_2_RXD4: U13.50 U14.50
GP42_I2S_2_RXD5: U16.50 U17.50
GP42_I2S_2_RXD6: U19.50 U20.50
GP42_I2S_2_RXD7: U22.50 U23.50
GP43: U16.30 U17.30
GP43_I2S_2_TXD: U2.56 U3.56
GP43_I2S_2_TXD1: U4.56 U5.56
GP43_I2S_2_TXD2: U7.56 U8.56
GP43_I2S_2_TXD3: U10.56 U11.56
GP43_I2S_2_TXD4: U13.56 U14.56
GP43_I2S_2_TXD5: U16.56 U17.56
GP43_I2S_2_TXD6: U19.56 U20.56
GP43_I2S_2_TXD7: U22.56 U23.56
GP44: U2.24 U3.24
GP45: U2.26 U3.26
GP46: U2.28 U3.28
GP47: U2.30 U3.30
GP48: U2.32 U3.32
GP49: U2.34 U3.34
GP50: U16.28 U17.28
GP51: U16.26 U17.26
GP52: U16.25 U17.25
GP53: U16.24 U17.24
GP54: U19.48 U20.48
GP55: U19.42 U20.42
GP56: U19.34 U20.34
GP57: U19.32 U20.32
GP58: U19.30 U20.30
GP59: U19.28 U20.28
GP60: U19.26 U20.26
GP61: U19.25 U20.25
GP62: U19.24 U20.24
GP63: U22.48 U23.48
GP64: U22.42 U23.42
GP65: U22.34 U23.34
GP66: U22.32 U23.32
GP67: U22.30 U23.30
GP68: U22.28 U23.28
GP69: U22.26 U23.26
GP70: U22.25 U23.25
GP71: U22.24 U23.24
GP77_SD_0_CD#: U2.60 U3.60
GP77_SD_0_CD#1: U4.60 U5.60
GP77_SD_0_CD#2: U7.60 U8.60
GP77_SD_0_CD#3: U10.60 U11.60
GP77_SD_0_CD#4: U13.60 U14.60
GP77_SD_0_CD#5: U16.60 U17.60
GP77_SD_0_CD#6: U19.60 U20.60
GP77_SD_0_CD#7: U22.60 U23.60
GP78_SD_0_CLK: U2.58 U3.58
GP78_SD_0_CLK1: U4.58 U5.58
GP78_SD_0_CLK2: U7.58 U8.58
GP78_SD_0_CLK3: U10.58 U11.58
GP78_SD_0_CLK4: U13.58 U14.58
GP78_SD_0_CLK5: U16.58 U17.58
GP78_SD_0_CLK6: U19.58 U20.58
GP78_SD_0_CLK7: U22.58 U23.58
GP79_SD_0_CMD: U2.62 U3.62
GP79_SD_0_CMD1: U4.62 U5.62
GP79_SD_0_CMD2: U7.62 U8.62
GP79_SD_0_CMD3: U10.62 U11.62
GP79_SD_0_CMD4: U13.62 U14.62
GP79_SD_0_CMD5: U16.62 U17.62
GP79_SD_0_CMD6: U19.62 U20.62
GP79_SD_0_CMD7: U22.62 U23.62
GP80_SD_0_DAT0: U2.66 U3.66
GP80_SD_0_DAT1: U4.66 U5.66
GP80_SD_0_DAT2: U7.66 U8.66
GP80_SD_0_DAT3: U10.66 U11.66
GP80_SD_0_DAT4: U13.66 U14.66
GP80_SD_0_DAT5: U16.66 U17.66
GP80_SD_0_DAT6: U19.66 U20.66
GP80_SD_0_DAT7: U22.66 U23.66
GP81_SD_0_DAT1: U2.70 U3.70
GP81_SD_0_DAT2: U4.70 U5.70
GP81_SD_0_DAT3: U7.70 U8.70
GP81_SD_0_DAT4: U10.70 U11.70
GP81_SD_0_DAT5: U13.70 U14.70
GP81_SD_0_DAT6: U16.70 U17.70
GP81_SD_0_DAT7: U19.70 U20.70
GP81_SD_0_DAT8: U22.70 U23.70
GP82_SD_0_DAT1: U4.64 U5.64
GP82_SD_0_DAT2: U2.64 U3.64
GP82_SD_0_DAT3: U7.64 U8.64
GP82_SD_0_DAT4: U10.64 U11.64
GP82_SD_0_DAT5: U13.64 U14.64
GP82_SD_0_DAT6: U16.64 U17.64
GP82_SD_0_DAT7: U19.64 U20.64
GP82_SD_0_DAT8: U22.64 U23.64
GP83_SD_0_DAT1: U4.68 U5.68
GP83_SD_0_DAT2: U7.68 U8.68
GP83_SD_0_DAT3: U2.68 U3.68
GP83_SD_0_DAT4: U10.68 U11.68
GP83_SD_0_DAT5: U13.68 U14.68
GP83_SD_0_DAT6: U16.68 U17.68
GP83_SD_0_DAT7: U19.68 U20.68
GP83_SD_0_DAT8: U22.68 U23.68
GP84_SD_CLK_FB: U2.44 U3.44
GP84_SD_CLK_FB1: U4.44 U5.44
GP84_SD_CLK_FB2: U7.44 U8.44
GP84_SD_CLK_FB3: U10.44 U11.44
GP84_SD_CLK_FB4: U13.44 U14.44
GP84_SD_CLK_FB5: U16.44 U17.44
GP84_SD_CLK_FB6: U19.44 U20.44
GP84_SD_CLK_FB7: U22.44 U23.44
GP109_SPI_2_CLK: U2.55 U3.55
GP109_SPI_2_CLK1: U4.55 U5.55
GP109_SPI_2_CLK2: U7.55 U8.55
GP109_SPI_2_CLK3: U10.55 U11.55
GP109_SPI_2_CLK4: U13.55 U14.55
GP109_SPI_2_CLK5: U16.55 U17.55
GP109_SPI_2_CLK6: U19.55 U20.55
GP109_SPI_2_CLK7: U22.55 U23.55
GP110_SPI_2_FS0: U2.53 U3.53
GP110_SPI_2_FS1: U4.53 U5.53
GP110_SPI_2_FS2: U7.53 U8.53
GP110_SPI_2_FS3: U10.53 U11.53
GP110_SPI_2_FS4: U13.53 U14.53
GP110_SPI_2_FS5: U16.53 U17.53
GP110_SPI_2_FS6: U19.53 U20.53
GP110_SPI_2_FS7: U22.53 U23.53
GP111_SPI_2_FS1: U2.51 U3.51
GP111_SPI_2_FS2: U4.51 U5.51
GP111_SPI_2_FS3: U7.51 U8.51
GP111_SPI_2_FS4: U10.51 U11.51
GP111_SPI_2_FS5: U13.51 U14.51
GP111_SPI_2_FS6: U16.51 U17.51
GP111_SPI_2_FS7: U19.51 U20.51
GP111_SPI_2_FS8: U22.51 U23.51
GP114_SPI_2_RXD: U2.59 U3.59
GP114_SPI_2_RXD1: U4.59 U5.59
GP114_SPI_2_RXD2: U7.59 U8.59
GP114_SPI_2_RXD3: U10.59 U11.59
GP114_SPI_2_RXD4: U13.59 U14.59
GP114_SPI_2_RXD5: U16.59 U17.59
GP114_SPI_2_RXD6: U19.59 U20.59
GP114_SPI_2_RXD7: U22.59 U23.59
GP115_SPI_2_TXD: U2.57 U3.57
GP115_SPI_2_TXD1: U4.57 U5.57
GP115_SPI_2_TXD2: U7.57 U8.57
GP115_SPI_2_TXD3: U10.57 U11.57
GP115_SPI_2_TXD4: U13.57 U14.57
GP115_SPI_2_TXD5: U16.57 U17.57
GP115_SPI_2_TXD6: U19.57 U20.57
GP115_SPI_2_TXD7: U22.57 U23.57
GP128_UART_1_CTS: U2.65 U3.65
GP128_UART_1_CTS1: U4.65 U5.65
GP128_UART_1_CTS2: U7.65 U8.65
GP128_UART_1_CTS3: U10.65 U11.65
GP128_UART_1_CTS4: U13.65 U14.65
GP128_UART_1_CTS5: U16.65 U17.65
GP128_UART_1_CTS6: U19.65 U20.65
GP128_UART_1_CTS7: U22.65 U23.65
GP129_UART_1_RTS: U2.63 U3.63
GP129_UART_1_RTS1: U4.63 U5.63
GP129_UART_1_RTS2: U7.63 U8.63
GP129_UART_1_RTS3: U10.63 U11.63
GP129_UART_1_RTS4: U13.63 U14.63
GP129_UART_1_RTS5: U16.63 U17.63
GP129_UART_1_RTS6: U19.63 U20.63
GP129_UART_1_RTS7: U22.63 U23.63
GP130_UART_1_RX: U2.61 U3.61
GP130_UART_1_RX1: U4.61 U5.61
GP130_UART_1_RX2: U7.61 U8.61
GP130_UART_1_RX3: U10.61 U11.61
GP130_UART_1_RX4: U13.61 U14.61
GP130_UART_1_RX5: U16.61 U17.61
GP130_UART_1_RX6: U19.61 U20.61
GP130_UART_1_RX7: U22.61 U23.61
GP131_UART_1_TX: U2.46 U3.46
GP131_UART_1_TX1: U4.46 U5.46
GP131_UART_1_TX2: U7.46 U8.46
GP131_UART_1_TX3: U10.46 U11.46
GP131_UART_1_TX4: U13.46 U14.46
GP131_UART_1_TX5: U16.46 U17.46
GP131_UART_1_TX6: U19.46 U20.46
GP131_UART_1_TX7: U22.46 U23.46
GP134_UART_2_RX: U2.22 U3.22
GP134_UART_2_RX1: U4.22 U5.22
GP134_UART_2_RX2: U7.22 U8.22
GP134_UART_2_RX3: U10.22 U11.22
GP134_UART_2_RX4: U13.22 U14.22
GP134_UART_2_RX5: U16.22 U17.22
GP134_UART_2_RX6: U19.22 U20.22
GP134_UART_2_RX7: U22.22 U23.22
GP135_UART_2_TX: U2.27 U3.27
GP135_UART_2_TX1: U4.27 U5.27
GP135_UART_2_TX2: U7.27 U8.27
GP135_UART_2_TX3: U10.27 U11.27
GP135_UART_2_TX4: U13.27 U14.27
GP135_UART_2_TX5: U16.27 U17.27
GP135_UART_2_TX6: U19.27 U20.27
GP135_UART_2_TX7: U22.27 U23.27
GP165: U2.25 U3.25
GP182_PWM1: U4.37 U5.37
GP182_PWM2: U2.37 U3.37
GP182_PWM3: U7.37 U8.37
GP182_PWM4: U10.37 U11.37
GP182_PWM5: U13.37 U14.37
GP182_PWM6: U16.37 U17.37
GP182_PWM7: U19.37 U20.37
GP182_PWM8: U22.37 U23.37
GP183_PWM1: U4.39 U5.39
GP183_PWM2: U7.39 U8.39
GP183_PWM3: U2.39 U3.39
GP183_PWM4: U10.39 U11.39
GP183_PWM5: U13.39 U14.39
GP183_PWM6: U16.39 U17.39
GP183_PWM7: U19.39 U20.39
GP183_PWM8: U22.39 U23.39
MSIC_SLP_CLK: U2.7 U3.7
MSIC_SLP_CLK1: U4.7 U5.7
MSIC_SLP_CLK2: U7.7 U8.7
MSIC_SLP_CLK3: U10.7 U11.7
MSIC_SLP_CLK4: U13.7 U14.7
MSIC_SLP_CLK5: U16.7 U17.7
MSIC_SLP_CLK6: U19.7 U20.7
MSIC_SLP_CLK7: U22.7 U23.7
N$1: R4.2 U6.5
N$2: D2.C R3.1
N$3: R1.2 U1.5
N$4: D1.A R2.1
N$5: D1.C U1.1
N$6: D3.A R5.1
N$7: D2.A SJ1.1
N$8: D3.C U6.1
N$9: D4.C R6.1
N$10: D4.A SJ2.1
N$11: R7.2 U9.5
N$12: D5.A R8.1
N$13: D5.C U9.1
N$14: D6.C R9.1
N$15: D6.A SJ3.1
N$16: R10.2 U12.5
N$17: D7.A R11.1
N$18: D7.C U12.1
N$19: D8.C R12.1
N$20: D8.A SJ4.1
N$21: R13.2 U15.5
N$22: D9.A R14.1
N$23: D9.C U15.1
N$24: D10.C R15.1
N$25: D10.A SJ5.1
N$26: R16.2 U18.5
N$27: D11.A R17.1
N$28: D11.C U18.1
N$29: D12.C R18.1
N$30: D12.A SJ6.1
N$31: R19.2 U21.5
N$32: D13.A R20.1
N$33: D13.C U21.1
N$34: D14.C R21.1
N$35: D14.A SJ7.1
N$36: R22.2 U24.5
N$37: D15.A R23.1
N$38: D15.C U24.1
N$39: D16.C R24.1
N$40: D16.A SJ8.1
OSC_CLK_OUT: U2.67 U3.67
OSC_CLK_OUT1: U4.67 U5.67
OSC_CLK_OUT2: U7.67 U8.67
OSC_CLK_OUT3: U10.67 U11.67
OSC_CLK_OUT4: U13.67 U14.67
OSC_CLK_OUT5: U16.67 U17.67
OSC_CLK_OUT6: U19.67 U20.67
OSC_CLK_OUT7: U22.67 U23.67
PSW: U2.21 U3.21
PSW1: U4.21 U5.21
PSW2: U7.21 U8.21
PSW3: U10.21 U11.21
PSW4: U13.21 U14.21
PSW5: U16.21 U17.21
PSW6: U19.21 U20.21
PSW7: U22.21 U23.21
PWRBTN#: U2.17 U3.17
PWRBTN#1: U4.17 U5.17
PWRBTN#2: U7.17 U8.17
PWRBTN#3: U10.17 U11.17
PWRBTN#4: U13.17 U14.17
PWRBTN#5: U16.17 U17.17
PWRBTN#6: U19.17 U20.17
PWRBTN#7: U22.17 U23.17
RCVR_MODE: U2.31 U3.31
RCVR_MODE1: U4.31 U5.31
RCVR_MODE2: U7.31 U8.31
RCVR_MODE3: U10.31 U11.31
RCVR_MODE4: U13.31 U14.31
RCVR_MODE5: U16.31 U17.31
RCVR_MODE6: U19.31 U20.31
RCVR_MODE7: U22.31 U23.31
RESET_OUT#: U2.36 U3.36
RESET_OUT#1: U4.36 U5.36
RESET_OUT#2: U7.36 U8.36
RESET_OUT#3: U10.36 U11.36
RESET_OUT#4: U13.36 U14.36
RESET_OUT#5: U16.36 U17.36
RESET_OUT#6: U19.36 U20.36
RESET_OUT#7: U22.36 U23.36
USB_DN: U2.18 U3.18
USB_DN1: U4.18 U5.18
USB_DN2: U7.18 U8.18
USB_DN3: U10.18 U11.18
USB_DN4: U13.18 U14.18
USB_DN5: U16.18 U17.18
USB_DN6: U19.18 U20.18
USB_DN7: U22.18 U23.18
USB_DP: U2.16 U3.16
USB_DP1: U4.16 U5.16
USB_DP2: U7.16 U8.16
USB_DP3: U10.16 U11.16
USB_DP4: U13.16 U14.16
USB_DP5: U16.16 U17.16
USB_DP6: U19.16 U20.16
USB_DP7: U22.16 U23.16
USB_ID: U2.3 U3.3
USB_ID1: U4.3 U5.3
USB_ID2: U7.3 U8.3
USB_ID3: U10.3 U11.3
USB_ID4: U13.3 U14.3
USB_ID5: U16.3 U17.3
USB_ID6: U19.3 U20.3
USB_ID7: U22.3 U23.3
USB_VBUS: U2.20 U3.20
USB_VBUS1: U4.20 U5.20
USB_VBUS2: U7.20 U8.20
USB_VBUS3: U10.20 U11.20
USB_VBUS4: U13.20 U14.20
USB_VBUS5: U16.20 U17.20
USB_VBUS6: U19.20 U20.20
USB_VBUS7: U22.20 U23.20
V_BAT_BKUP: U2.23 U3.23
V_BAT_BKUP1: U4.23 U5.23
V_BAT_BKUP2: U7.23 U8.23
V_BAT_BKUP3: U10.23 U11.23
V_BAT_BKUP4: U13.23 U14.23
V_BAT_BKUP5: U16.23 U17.23
V_BAT_BKUP6: U19.23 U20.23
V_BAT_BKUP7: U22.23 U23.23
VBAT: C2.1 JP3.1 SW1.P U1.3
VBAT1: C4.1 JP4.1 SW2.P U6.3
VBAT2: C6.1 JP6.1 SW3.P U9.3
VBAT3: C8.1 JP8.1 SW4.P U12.3
VBAT4: C10.1 JP10.1 SW5.P U15.3
VBAT5: C12.1 JP12.1 SW6.P U18.3
VBAT6: C14.1 JP14.1 SW7.P U21.3
VBAT7: C16.1 JP16.1 SW8.P U24.3
VIN: C1.1 JP1.VBUS1 R2.2 U1.4
VIN1: C3.1 JP2.VBUS1 R5.2 U6.4
VIN2: C5.1 JP5.VBUS1 R8.2 U9.4
VIN3: C7.1 JP7.VBUS1 R11.2 U12.4
VIN4: C9.1 JP9.VBUS1 R14.2 U15.4
VIN5: C11.1 JP11.VBUS1 R17.2 U18.4
VIN6: C13.1 JP13.VBUS1 R20.2 U21.4
VIN7: C15.1 JP15.VBUS1 R23.2 U24.4
VSYS: SJ1.2 SW1.S U2.2 U2.4 U2.6 U3.2 U3.4 U3.6
VSYS1: SJ2.2 SW2.S U4.2 U4.4 U4.6 U5.2 U5.4 U5.6
VSYS2: SJ3.2 SW3.S U7.2 U7.4 U7.6 U8.2 U8.4 U8.6
VSYS3: SJ4.2 SW4.S U10.2 U10.4 U10.6 U11.2 U11.4 U11.6
VSYS4: SJ5.2 SW5.S U13.2 U13.4 U13.6 U14.2 U14.4 U14.6
VSYS5: SJ6.2 SW6.S U16.2 U16.4 U16.6 U17.2 U17.4 U17.6
VSYS6: SJ7.2 SW7.S U19.2 U19.4 U19.6 U20.2 U20.4 U20.6
VSYS7: SJ8.2 SW8.S U22.2 U22.4 U22.6 U23.2 U23.4 U23.6

## Tracks (layer width: path | path; a pad name or v marks a point on that pad's centre or on a via)
1.8V  (via drill 0.33)
  Top 0.152: U3.12 30.79,27.84 v30.43,28.19 | U3.12
  Bottom 0.152: U3.12 | 30.68,27.94 v30.43,28.19 30.79,27.84 30.84,27.84 | U3.12 30.84,27.84 | 30.84,27.84
1.8V1  (via drill 0.33)
  Top 0.152: U5.12 63.8,27.84 v63.45,28.19 | U5.12
  Bottom 0.152: U5.12 | 63.7,27.94 v63.45,28.19 63.8,27.84 63.86,27.84 | U5.12 63.86,27.84 | 63.86,27.84
1.8V2  (via drill 0.33)
  Top 0.152: U8.12 96.83,27.84 v96.47,28.19 | U8.12
  Bottom 0.152: U8.12 | 96.72,27.94 v96.47,28.19 96.83,27.84 96.88,27.84 | U8.12 96.88,27.84 | 96.88,27.84
1.8V3  (via drill 0.33)
  Top 0.152: U11.12 129.84,27.84 v129.49,28.19 | U11.12
  Bottom 0.152: U11.12 | 129.74,27.94 v129.49,28.19 129.84,27.84 129.9,27.84 | U11.12 129.9,27.84 | 129.9,27.84
1.8V4  (via drill 0.33)
  Top 0.152: U14.12 30.79,76.1 v30.43,76.45 | U14.12
  Bottom 0.152: U14.12 | 30.68,76.2 v30.43,76.45 30.79,76.1 30.84,76.1 | U14.12 30.84,76.1 | 30.84,76.1
1.8V5  (via drill 0.33)
  Top 0.152: U17.12 63.8,76.1 v63.45,76.45 | U17.12
  Bottom 0.152: U17.12 | 63.7,76.2 v63.45,76.45 63.8,76.1 63.86,76.1 | U17.12 63.86,76.1 | 63.86,76.1
1.8V6  (via drill 0.33)
  Top 0.152: U20.12 96.83,76.1 v96.47,76.45 | U20.12
  Bottom 0.152: U20.12 | 96.72,76.2 v96.47,76.45 96.83,76.1 96.88,76.1 | U20.12 96.88,76.1 | 96.88,76.1
1.8V7  (via drill 0.33)
  Top 0.152: U23.12 129.84,76.1 v129.49,76.45 | U23.12
  Bottom 0.152: U23.12 | 129.74,76.2 v129.49,76.45 129.84,76.1 129.9,76.1 | U23.12 129.9,76.1 | 129.9,76.1
3.3V  (via drill 0.33)
  Top 0.152: v29.95,29.35 30.59,29.35 31.31,28.64 31.37,28.64 | 31.37,28.64 U3.8 | U3.10 31.45,28.24 31.37,28.32 31.37,28.64
  Bottom 0.152: U3.8 | v29.95,29.35 30.59,29.35 31.31,28.64 31.37,28.64 | 31.37,28.64 U3.8 | U3.10 31.45,28.24 31.37,28.32 31.37,28.64
3.3V1  (via drill 0.33)
  Top 0.152: v62.97,29.35 63.61,29.35 64.33,28.64 64.39,28.64 | 64.39,28.64 U5.8 | U5.10 64.47,28.24 64.39,28.32 64.39,28.64
  Bottom 0.152: U5.8 | v62.97,29.35 63.61,29.35 64.33,28.64 64.39,28.64 | 64.39,28.64 U5.8 | U5.10 64.47,28.24 64.39,28.32 64.39,28.64
3.3V2  (via drill 0.33)
  Top 0.152: v95.99,29.35 96.63,29.35 97.35,28.64 97.41,28.64 | 97.41,28.64 U8.8 | U8.10 97.49,28.24 97.41,28.32 97.41,28.64
  Bottom 0.152: U8.8 | v95.99,29.35 96.63,29.35 97.35,28.64 97.41,28.64 | 97.41,28.64 U8.8 | U8.10 97.49,28.24 97.41,28.32 97.41,28.64
3.3V3  (via drill 0.33)
  Top 0.152: v129.01,29.35 129.65,29.35 130.37,28.64 130.43,28.64 | 130.43,28.64 U11.8 | U11.10 130.51,28.24 130.43,28.32 130.43,28.64
  Bottom 0.152: U11.8 | v129.01,29.35 129.65,29.35 130.37,28.64 130.43,28.64 | 130.43,28.64 U11.8 | U11.10 130.51,28.24 130.43,28.32 130.43,28.64
3.3V4  (via drill 0.33)
  Top 0.152: v29.95,77.61 30.59,77.61 31.31,76.9 31.37,76.9 | 31.37,76.9 U14.8 | U14.10 31.45,76.5 31.37,76.58 31.37,76.9
  Bottom 0.152: U14.8 | v29.95,77.61 30.59,77.61 31.31,76.9 31.37,76.9 | 31.37,76.9 U14.8 | U14.10 31.45,76.5 31.37,76.58 31.37,76.9
3.3V5  (via drill 0.33)
  Top 0.152: v62.97,77.61 63.61,77.61 64.33,76.9 64.39,76.9 | 64.39,76.9 U17.8 | U17.10 64.47,76.5 64.39,76.58 64.39,76.9
  Bottom 0.152: U17.8 | v62.97,77.61 63.61,77.61 64.33,76.9 64.39,76.9 | 64.39,76.9 U17.8 | U17.10 64.47,76.5 64.39,76.58 64.39,76.9
3.3V6  (via drill 0.33)
  Top 0.152: v95.99,77.61 96.63,77.61 97.35,76.9 97.41,76.9 | 97.41,76.9 U20.8 | U20.10 97.49,76.5 97.41,76.58 97.41,76.9
  Bottom 0.152: U20.8 | v95.99,77.61 96.63,77.61 97.35,76.9 97.41,76.9 | 97.41,76.9 U20.8 | U20.10 97.49,76.5 97.41,76.58 97.41,76.9
3.3V7  (via drill 0.33)
  Top 0.152: v129.01,77.61 129.65,77.61 130.37,76.9 130.43,76.9 | 130.43,76.9 U23.8 | U23.10 130.51,76.5 130.43,76.58 130.43,76.9
  Bottom 0.152: U23.8 | v129.01,77.61 129.65,77.61 130.37,76.9 130.43,76.9 | 130.43,76.9 U23.8 | U23.10 130.51,76.5 130.43,76.58 130.43,76.9
DCIN  (via drill 0.33)
  Top 0.152: U2.14 30.2,27.44 29.79,27.84 29.79,27.99 29.16,28.63 v29.16,28.65
  Bottom 0.152: v29.16,28.65 29.16,28.63 29.79,27.99 29.79,27.84 30.2,27.44 U2.14
DCIN1  (via drill 0.33)
  Top 0.152: U4.14 63.22,27.44 62.81,27.84 62.81,27.99 62.18,28.63 v62.18,28.65
  Bottom 0.152: v62.18,28.65 62.18,28.63 62.81,27.99 62.81,27.84 63.22,27.44 U4.14
DCIN2  (via drill 0.33)
  Top 0.152: U7.14 96.23,27.44 95.83,27.84 95.83,27.99 95.2,28.63 v95.2,28.65
  Bottom 0.152: v95.2,28.65 95.2,28.63 95.83,27.99 95.83,27.84 96.23,27.44 U7.14
DCIN3  (via drill 0.33)
  Top 0.152: U10.14 129.25,27.44 128.85,27.84 128.85,27.99 128.22,28.63 v128.22,28.65
  Bottom 0.152: v128.22,28.65 128.22,28.63 128.85,27.99 128.85,27.84 129.25,27.44 U10.14
DCIN4  (via drill 0.33)
  Top 0.152: U13.14 30.2,75.7 29.79,76.1 29.79,76.25 29.16,76.89 v29.16,76.91
  Bottom 0.152: v29.16,76.91 29.16,76.89 29.79,76.25 29.79,76.1 30.2,75.7 U13.14
DCIN5  (via drill 0.33)
  Top 0.152: U16.14 63.22,75.7 62.81,76.1 62.81,76.25 62.18,76.89 v62.18,76.91
  Bottom 0.152: v62.18,76.91 62.18,76.89 62.81,76.25 62.81,76.1 63.22,75.7 U16.14
DCIN6  (via drill 0.33)
  Top 0.152: U19.14 96.23,75.7 95.83,76.1 95.83,76.25 95.2,76.89 v95.2,76.91
  Bottom 0.152: v95.2,76.91 95.2,76.89 95.83,76.25 95.83,76.1 96.23,75.7 U19.14
DCIN7  (via drill 0.33)
  Top 0.152: U22.14 129.25,75.7 128.85,76.1 128.85,76.25 128.22,76.89 v128.22,76.91
  Bottom 0.152: v128.22,76.91 128.22,76.89 128.85,76.25 128.85,76.1 129.25,75.7 U22.14
FAULT  (via drill 0.33)
  Top 0.152: U3.19 35.64,26.24 35.81,26.42 36.63,26.42 36.93,26.72 37.44,26.72 v38.1,27.38
  Bottom 0.152: v38.1,27.38 37.44,26.72 36.93,26.72 36.63,26.42 35.81,26.42 35.64,26.24 U3.19
FAULT1  (via drill 0.33)
  Top 0.152: U5.19 68.66,26.24 68.83,26.42 69.65,26.42 69.95,26.72 70.46,26.72 v71.12,27.38
  Bottom 0.152: v71.12,27.38 70.46,26.72 69.95,26.72 69.65,26.42 68.83,26.42 68.66,26.24 U5.19
FAULT2  (via drill 0.33)
  Top 0.152: U8.19 101.68,26.24 101.85,26.42 102.67,26.42 102.97,26.72 103.48,26.72 v104.14,27.38
  Bottom 0.152: v104.14,27.38 103.48,26.72 102.97,26.72 102.67,26.42 101.85,26.42 101.68,26.24 U8.19
FAULT3  (via drill 0.33)
  Top 0.152: U11.19 134.7,26.24 134.87,26.42 135.69,26.42 135.99,26.72 136.5,26.72 v137.16,27.38
  Bottom 0.152: v137.16,27.38 136.5,26.72 135.99,26.72 135.69,26.42 134.87,26.42 134.7,26.24 U11.19
FAULT4  (via drill 0.33)
  Top 0.152: U14.19 35.64,74.5 35.81,74.68 36.63,74.68 36.93,74.98 37.44,74.98 v38.1,75.64
  Bottom 0.152: v38.1,75.64 37.44,74.98 36.93,74.98 36.63,74.68 35.81,74.68 35.64,74.5 U14.19
FAULT5  (via drill 0.33)
  Top 0.152: U17.19 68.66,74.5 68.83,74.68 69.65,74.68 69.95,74.98 70.46,74.98 v71.12,75.64
  Bottom 0.152: v71.12,75.64 70.46,74.98 69.95,74.98 69.65,74.68 68.83,74.68 68.66,74.5 U17.19
FAULT6  (via drill 0.33)
  Top 0.152: U20.19 101.68,74.5 101.85,74.68 102.67,74.68 102.97,74.98 103.48,74.98 v104.14,75.64
  Bottom 0.152: v104.14,75.64 103.48,74.98 102.97,74.98 102.67,74.68 101.85,74.68 101.68,74.5 U20.19
FAULT7  (via drill 0.33)
  Top 0.152: U23.19 134.7,74.5 134.87,74.68 135.69,74.68 135.99,74.98 136.5,74.98 v137.16,75.64
  Bottom 0.152: v137.16,75.64 136.5,74.98 135.99,74.98 135.69,74.68 134.87,74.68 134.7,74.5 U23.19
FW_RCVR  (via drill 0.33)
  Top 0.152: v35.38,15.16 35.79,15.57 35.79,16.1 35.65,16.24 U3.69
  Bottom 0.152: U3.69 35.65,16.24 35.79,16.1 35.79,15.57 v35.38,15.16
FW_RCVR1  (via drill 0.33)
  Top 0.152: v68.4,15.16 68.81,15.57 68.81,16.1 68.67,16.24 U5.69
  Bottom 0.152: U5.69 68.67,16.24 68.81,16.1 68.81,15.57 v68.4,15.16
FW_RCVR2  (via drill 0.33)
  Top 0.152: v101.42,15.16 101.83,15.57 101.83,16.1 101.69,16.24 U8.69
  Bottom 0.152: U8.69 101.69,16.24 101.83,16.1 101.83,15.57 v101.42,15.16
FW_RCVR3  (via drill 0.33)
  Top 0.152: v134.44,15.16 134.85,15.57 134.85,16.1 134.71,16.24 U11.69
  Bottom 0.152: U11.69 134.71,16.24 134.85,16.1 134.85,15.57 v134.44,15.16
FW_RCVR4  (via drill 0.33)
  Top 0.152: v35.38,63.42 35.79,63.83 35.79,64.36 35.65,64.5 U14.69
  Bottom 0.152: U14.69 35.65,64.5 35.79,64.36 35.79,63.83 v35.38,63.42
FW_RCVR5  (via drill 0.33)
  Top 0.152: v68.4,63.42 68.81,63.83 68.81,64.36 68.67,64.5 U17.69
  Bottom 0.152: U17.69 68.67,64.5 68.81,64.36 68.81,63.83 v68.4,63.42
FW_RCVR6  (via drill 0.33)
  Top 0.152: v101.42,63.42 101.83,63.83 101.83,64.36 101.69,64.5 U20.69
  Bottom 0.152: U20.69 101.69,64.5 101.83,64.36 101.83,63.83 v101.42,63.42
FW_RCVR7  (via drill 0.33)
  Top 0.152: v134.44,63.42 134.85,63.83 134.85,64.36 134.71,64.5 U23.69
  Bottom 0.152: U23.69 134.71,64.5 134.85,64.36 134.85,63.83 v134.44,63.42
GND  (via drill 0.33, 0.51)
  other vias: 36.02,27.38 37.13,29.03 20.45,49.15 27.81,49.15
  pour Bottom (isolate 0.051, rank 6): 39.37,49.53 39.37,8.64 arc-90 37.59,6.86 10.67,6.86 arc-90 8.89,8.64 8.89,49.53 arc-90 10.67,51.31 37.59,51.31 arc-90
  pour Top (isolate 0.051, rank 6): 39.37,8.59 arc-90 37.64,6.86 10.67,6.86 arc-90 8.89,8.64 8.89,49.53 arc-90 10.67,51.31 37.59,51.31 arc-90 39.37,49.53
GND1  (via drill 0.33, 0.51)
  other vias: 69.04,27.38 70.15,29.03 53.47,49.15 60.83,49.15
  pour Bottom (isolate 0.051, rank 6): 72.39,49.53 72.39,8.64 arc-90 70.61,6.86 43.69,6.86 arc-90 41.91,8.64 41.91,49.53 arc-90 43.69,51.31 70.61,51.31 arc-90
  pour Top (isolate 0.051, rank 6): 72.39,8.59 arc-90 70.66,6.86 43.69,6.86 arc-90 41.91,8.64 41.91,49.53 arc-90 43.69,51.31 70.61,51.31 arc-90 72.39,49.53
GND2  (via drill 0.33, 0.51)
  other vias: 102.06,27.38 103.17,29.03 86.49,49.15 93.85,49.15
  pour Bottom (isolate 0.051, rank 6): 105.41,49.53 105.41,8.64 arc-90 103.63,6.86 76.71,6.86 arc-90 74.93,8.64 74.93,49.53 arc-90 76.71,51.31 103.63,51.31 arc-90
  pour Top (isolate 0.051, rank 6): 105.41,8.59 arc-90 103.68,6.86 76.71,6.86 arc-90 74.93,8.64 74.93,49.53 arc-90 76.71,51.31 103.63,51.31 arc-90 105.41,49.53
GND3  (via drill 0.33, 0.51)
  other vias: 135.08,27.38 136.19,29.03 119.51,49.15 126.87,49.15
  pour Bottom (isolate 0.051, rank 6): 138.43,49.53 138.43,8.64 arc-90 136.65,6.86 109.73,6.86 arc-90 107.95,8.64 107.95,49.53 arc-90 109.73,51.31 136.65,51.31 arc-90
  pour Top (isolate 0.051, rank 6): 138.43,8.59 arc-90 136.7,6.86 109.73,6.86 arc-90 107.95,8.64 107.95,49.53 arc-90 109.73,51.31 136.65,51.31 arc-90 138.43,49.53
GND4  (via drill 0.33, 0.51)
  other vias: 36.02,75.64 37.13,77.29 20.45,97.41 27.81,97.41
  pour Bottom (isolate 0.051, rank 6): 39.37,97.79 39.37,56.9 arc-90 37.59,55.12 10.67,55.12 arc-90 8.89,56.9 8.89,97.79 arc-90 10.67,99.57 37.59,99.57 arc-90
  pour Top (isolate 0.051, rank 6): 39.37,56.85 arc-90 37.64,55.12 10.67,55.12 arc-90 8.89,56.9 8.89,97.79 arc-90 10.67,99.57 37.59,99.57 arc-90 39.37,97.79
GND5  (via drill 0.33, 0.51)
  other vias: 69.04,75.64 70.15,77.29 53.47,97.41 60.83,97.41
  pour Bottom (isolate 0.051, rank 6): 72.39,97.79 72.39,56.9 arc-90 70.61,55.12 43.69,55.12 arc-90 41.91,56.9 41.91,97.79 arc-90 43.69,99.57 70.61,99.57 arc-90
  pour Top (isolate 0.051, rank 6): 72.39,56.85 arc-90 70.66,55.12 43.69,55.12 arc-90 41.91,56.9 41.91,97.79 arc-90 43.69,99.57 70.61,99.57 arc-90 72.39,97.79
GND6  (via drill 0.33, 0.51)
  other vias: 102.06,75.64 103.17,77.29 86.49,97.41 93.85,97.41
  pour Bottom (isolate 0.051, rank 6): 105.41,97.79 105.41,56.9 arc-90 103.63,55.12 76.71,55.12 arc-90 74.93,56.9 74.93,97.79 arc-90 76.71,99.57 103.63,99.57 arc-90
  pour Top (isolate 0.051, rank 6): 105.41,56.85 arc-90 103.68,55.12 76.71,55.12 arc-90 74.93,56.9 74.93,97.79 arc-90 76.71,99.57 103.63,99.57 arc-90 105.41,97.79
GND7  (via drill 0.33, 0.51)
  other vias: 135.08,75.64 136.19,77.29 119.51,97.41 126.87,97.41
  pour Bottom (isolate 0.051, rank 6): 138.43,97.79 138.43,56.9 arc-90 136.65,55.12 109.73,55.12 arc-90 107.95,56.9 107.95,97.79 arc-90 109.73,99.57 136.65,99.57 arc-90
  pour Top (isolate 0.051, rank 6): 138.43,56.85 arc-90 136.7,55.12 109.73,55.12 arc-90 107.95,56.9 107.95,97.79 arc-90 109.73,99.57 136.65,99.57 arc-90 138.43,97.79
GP1  (via drill 0.33)
  Top 0.152: v63.17,20.62 63.18,20.64 U5.48
  Bottom 0.152: U5.48 63.18,20.64 v63.17,20.62
GP2  (via drill 0.33)
  Top 0.152: U5.42 64.27,21.84 v64.08,22.02
  Bottom 0.152: v64.08,22.02 64.27,21.84 U5.42
GP3  (via drill 0.33)
  Top 0.152: U5.34 64.13,23.44 63.6,22.91 63.04,22.91 62.46,23.5 61.85,23.5 v61.57,23.77
  Bottom 0.152: v61.57,23.77 61.85,23.5 62.46,23.5 63.04,22.91 63.6,22.91 64.13,23.44 U5.34
GP4  (via drill 0.33)
  Top 0.152: v63.32,23.57 63.59,23.84 U5.32
  Bottom 0.152: U5.32 63.59,23.84 v63.32,23.57
GP5  (via drill 0.33)
  Top 0.152: U5.30 64.34,24.24 64.34,24.23 62.59,24.23 v62.51,24.16
  Bottom 0.152: v62.51,24.16 62.59,24.23 64.34,24.23 64.34,24.24 U5.30
GP6  (via drill 0.33)
  Top 0.152: U5.28 64.31,24.64 64.21,24.54 63.07,24.54 62.76,24.84 61.77,24.84 v61.72,24.79
  Bottom 0.152: v61.72,24.79 61.77,24.84 62.76,24.84 63.07,24.54 64.21,24.54 64.31,24.64 U5.28
GP7  (via drill 0.33)
  Top 0.152: v61.65,25.81 62.31,25.15 62.89,25.15 63.2,24.84 64.08,24.84 64.28,25.04 U5.26
  Bottom 0.152: U5.26 64.28,25.04 64.08,24.84 63.2,24.84 62.89,25.15 62.31,25.15 v61.65,25.81
GP8  (via drill 0.33)
  Top 0.152: v69.39,25.15 69.28,25.04 U5.25
  Bottom 0.152: U5.25 69.28,25.04 v69.39,25.15
GP9  (via drill 0.33)
  Top 0.152: U5.24 64.25,25.44 63.96,25.15 63.32,25.15 v62.66,25.81
  Bottom 0.152: v62.66,25.81 63.32,25.15 63.96,25.15 64.25,25.44 U5.24
GP10  (via drill 0.33)
  Top 0.152: v96.19,20.62 96.2,20.64 U8.48
  Bottom 0.152: U8.48 96.2,20.64 v96.19,20.62
GP11  (via drill 0.33)
  Top 0.152: U8.42 97.29,21.84 v97.1,22.02
  Bottom 0.152: v97.1,22.02 97.29,21.84 U8.42
GP12  (via drill 0.33)
  Top 0.152: U8.34 97.15,23.44 96.62,22.91 96.06,22.91 95.48,23.5 94.87,23.5 v94.59,23.77
  Bottom 0.152: v94.59,23.77 94.87,23.5 95.48,23.5 96.06,22.91 96.62,22.91 97.15,23.44 U8.34
GP12_PWM0  (via drill 0.33)
  Top 0.152: U3.35 35.53,23.04 35.71,23.22 v36.22,23.22
  Bottom 0.152: v36.22,23.22 35.71,23.22 35.53,23.04 U3.35 | U3.35
GP12_PWM1  (via drill 0.33)
  Top 0.152: U5.35 68.56,23.04 68.73,23.22 v69.24,23.22
  Bottom 0.152: v69.24,23.22 68.73,23.22 68.56,23.04 U5.35 | U5.35
GP12_PWM2  (via drill 0.33)
  Top 0.152: U8.35 101.58,23.04 101.75,23.22 v102.26,23.22
  Bottom 0.152: v102.26,23.22 101.75,23.22 101.58,23.04 U8.35 | U8.35
GP12_PWM3  (via drill 0.33)
  Top 0.152: U11.35 134.59,23.04 134.77,23.22 v135.28,23.22
  Bottom 0.152: v135.28,23.22 134.77,23.22 134.59,23.04 U11.35 | U11.35
GP12_PWM4  (via drill 0.33)
  Top 0.152: U14.35 35.53,71.3 35.71,71.48 v36.22,71.48
  Bottom 0.152: v36.22,71.48 35.71,71.48 35.53,71.3 U14.35 | U14.35
GP12_PWM5  (via drill 0.33)
  Top 0.152: U17.35 68.56,71.3 68.73,71.48 v69.24,71.48
  Bottom 0.152: v69.24,71.48 68.73,71.48 68.56,71.3 U17.35 | U17.35
GP12_PWM6  (via drill 0.33)
  Top 0.152: U20.35 101.58,71.3 101.75,71.48 v102.26,71.48
  Bottom 0.152: v102.26,71.48 101.75,71.48 101.58,71.3 U20.35 | U20.35
GP12_PWM7  (via drill 0.33)
  Top 0.152: U23.35 134.59,71.3 134.77,71.48 v135.28,71.48
  Bottom 0.152: v135.28,71.48 134.77,71.48 134.59,71.3 U23.35 | U23.35
GP13  (via drill 0.33)
  Top 0.152: v96.34,23.57 96.61,23.84 U8.32
  Bottom 0.152: U8.32 96.61,23.84 v96.34,23.57
GP13_PWM1  (via drill 0.33)
  Top 0.152: v38.53,24.43 38.51,24.43 37.82,23.75 37.29,23.75 37.16,23.88 35.94,23.88 35.5,23.44 U3.33
  Bottom 0.152: U3.33 35.5,23.44 35.94,23.88 37.16,23.88 37.29,23.75 37.82,23.75 38.51,24.43 v38.53,24.43
GP13_PWM2  (via drill 0.33)
  Top 0.152: v71.55,24.43 71.53,24.43 70.84,23.75 70.31,23.75 70.18,23.88 68.96,23.88 68.52,23.44 U5.33
  Bottom 0.152: U5.33 68.52,23.44 68.96,23.88 70.18,23.88 70.31,23.75 70.84,23.75 71.53,24.43 v71.55,24.43
GP13_PWM3  (via drill 0.33)
  Top 0.152: v104.57,24.43 104.55,24.43 103.86,23.75 103.33,23.75 103.2,23.88 101.98,23.88 101.54,23.44 U8.33
  Bottom 0.152: U8.33 101.54,23.44 101.98,23.88 103.2,23.88 103.33,23.75 103.86,23.75 104.55,24.43 v104.57,24.43
GP13_PWM4  (via drill 0.33)
  Top 0.152: v137.59,24.43 137.57,24.43 136.88,23.75 136.35,23.75 136.22,23.88 135,23.88 134.56,23.44 U11.33
  Bottom 0.152: U11.33 134.56,23.44 135,23.88 136.22,23.88 136.35,23.75 136.88,23.75 137.57,24.43 v137.59,24.43
GP13_PWM5  (via drill 0.33)
  Top 0.152: v38.53,72.69 38.51,72.69 37.82,72.01 37.29,72.01 37.16,72.14 35.94,72.14 35.5,71.7 U14.33
  Bottom 0.152: U14.33 35.5,71.7 35.94,72.14 37.16,72.14 37.29,72.01 37.82,72.01 38.51,72.69 v38.53,72.69
GP13_PWM6  (via drill 0.33)
  Top 0.152: v71.55,72.69 71.53,72.69 70.84,72.01 70.31,72.01 70.18,72.14 68.96,72.14 68.52,71.7 U17.33
  Bottom 0.152: U17.33 68.52,71.7 68.96,72.14 70.18,72.14 70.31,72.01 70.84,72.01 71.53,72.69 v71.55,72.69
GP13_PWM7  (via drill 0.33)
  Top 0.152: v104.57,72.69 104.55,72.69 103.86,72.01 103.33,72.01 103.2,72.14 101.98,72.14 101.54,71.7 U20.33
  Bottom 0.152: U20.33 101.54,71.7 101.98,72.14 103.2,72.14 103.33,72.01 103.86,72.01 104.55,72.69 v104.57,72.69
GP13_PWM8  (via drill 0.33)
  Top 0.152: v137.59,72.69 137.57,72.69 136.88,72.01 136.35,72.01 136.22,72.14 135,72.14 134.56,71.7 U23.33
  Bottom 0.152: U23.33 134.56,71.7 135,72.14 136.22,72.14 136.35,72.01 136.88,72.01 137.57,72.69 v137.59,72.69
GP14  (via drill 0.33)
  Top 0.152: v30.15,20.62 30.16,20.64 U3.48
  Bottom 0.152: U3.48 30.16,20.64 v30.15,20.62
GP15  (via drill 0.33)
  Top 0.152: U3.42 31.25,21.84 v31.06,22.02
  Bottom 0.152: v31.06,22.02 31.25,21.84 U3.42
GP16  (via drill 0.33)
  Top 0.152: U8.30 97.36,24.24 97.36,24.23 95.61,24.23 v95.53,24.16
  Bottom 0.152: v95.53,24.16 95.61,24.23 97.36,24.23 97.36,24.24 U8.30
GP17  (via drill 0.33)
  Top 0.152: U8.28 97.33,24.64 97.23,24.54 96.09,24.54 95.78,24.84 94.79,24.84 v94.74,24.79
  Bottom 0.152: v94.74,24.79 94.79,24.84 95.78,24.84 96.09,24.54 97.23,24.54 97.33,24.64 U8.28
GP18  (via drill 0.33)
  Top 0.152: v94.67,25.81 95.33,25.15 95.91,25.15 96.22,24.84 97.1,24.84 97.3,25.04 U8.26
  Bottom 0.152: U8.26 97.3,25.04 97.1,24.84 96.22,24.84 95.91,25.15 95.33,25.15 v94.67,25.81
GP19  (via drill 0.33)
  Top 0.152: v102.41,25.15 102.31,25.04 U8.25
  Bottom 0.152: U8.25 102.31,25.04 v102.41,25.15
GP19_I2C_1_SCL  (via drill 0.33)
  Top 0.152: U3.41 35.55,21.84 35.66,21.95 36.75,21.95 36.93,22.12 38.2,22.12 v38.35,22.28
  Bottom 0.152: v38.35,22.28 38.2,22.12 36.93,22.12 36.75,21.95 35.66,21.95 35.55,21.84 U3.41
GP19_I2C_1_SCL1  (via drill 0.33)
  Top 0.152: U5.41 68.57,21.84 68.68,21.95 69.77,21.95 69.95,22.12 71.22,22.12 v71.37,22.28
  Bottom 0.152: v71.37,22.28 71.22,22.12 69.95,22.12 69.77,21.95 68.68,21.95 68.57,21.84 U5.41
GP19_I2C_1_SCL2  (via drill 0.33)
  Top 0.152: U8.41 101.59,21.84 101.7,21.95 102.79,21.95 102.97,22.12 104.24,22.12 v104.39,22.28
  Bottom 0.152: v104.39,22.28 104.24,22.12 102.97,22.12 102.79,21.95 101.7,21.95 101.59,21.84 U8.41
GP19_I2C_1_SCL3  (via drill 0.33)
  Top 0.152: U11.41 134.61,21.84 134.72,21.95 135.81,21.95 135.99,22.12 137.26,22.12 v137.41,22.28
  Bottom 0.152: v137.41,22.28 137.26,22.12 135.99,22.12 135.81,21.95 134.72,21.95 134.61,21.84 U11.41
GP19_I2C_1_SCL4  (via drill 0.33)
  Top 0.152: U14.41 35.55,70.1 35.66,70.21 36.75,70.21 36.93,70.38 38.2,70.38 v38.35,70.54
  Bottom 0.152: v38.35,70.54 38.2,70.38 36.93,70.38 36.75,70.21 35.66,70.21 35.55,70.1 U14.41
GP19_I2C_1_SCL5  (via drill 0.33)
  Top 0.152: U17.41 68.57,70.1 68.68,70.21 69.77,70.21 69.95,70.38 71.22,70.38 v71.37,70.54
  Bottom 0.152: v71.37,70.54 71.22,70.38 69.95,70.38 69.77,70.21 68.68,70.21 68.57,70.1 U17.41
GP19_I2C_1_SCL6  (via drill 0.33)
  Top 0.152: U20.41 101.59,70.1 101.7,70.21 102.79,70.21 102.97,70.38 104.24,70.38 v104.39,70.54
  Bottom 0.152: v104.39,70.54 104.24,70.38 102.97,70.38 102.79,70.21 101.7,70.21 101.59,70.1 U20.41
GP19_I2C_1_SCL7  (via drill 0.33)
  Top 0.152: U23.41 134.61,70.1 134.72,70.21 135.81,70.21 135.99,70.38 137.26,70.38 v137.41,70.54
  Bottom 0.152: v137.41,70.54 137.26,70.38 135.99,70.38 135.81,70.21 134.72,70.21 134.61,70.1 U23.41
GP20  (via drill 0.33)
  Top 0.152: U8.24 97.27,25.44 96.98,25.15 96.34,25.15 v95.68,25.81